# Altium PCB MPPT_V1.0.1.PcbDoc (part 1 of 2)
Units mm, origin at the board's own origin, x right, y up, seen from the top; angles counter-clockwise.
Board outline 82 x 82 mm, 4 copper layers (Top Layer, GND Plane, PWR Plane, Bottom Layer), stack 1.641 mm thick; 90 components, 70 nets, 305 pads, 127 vias.
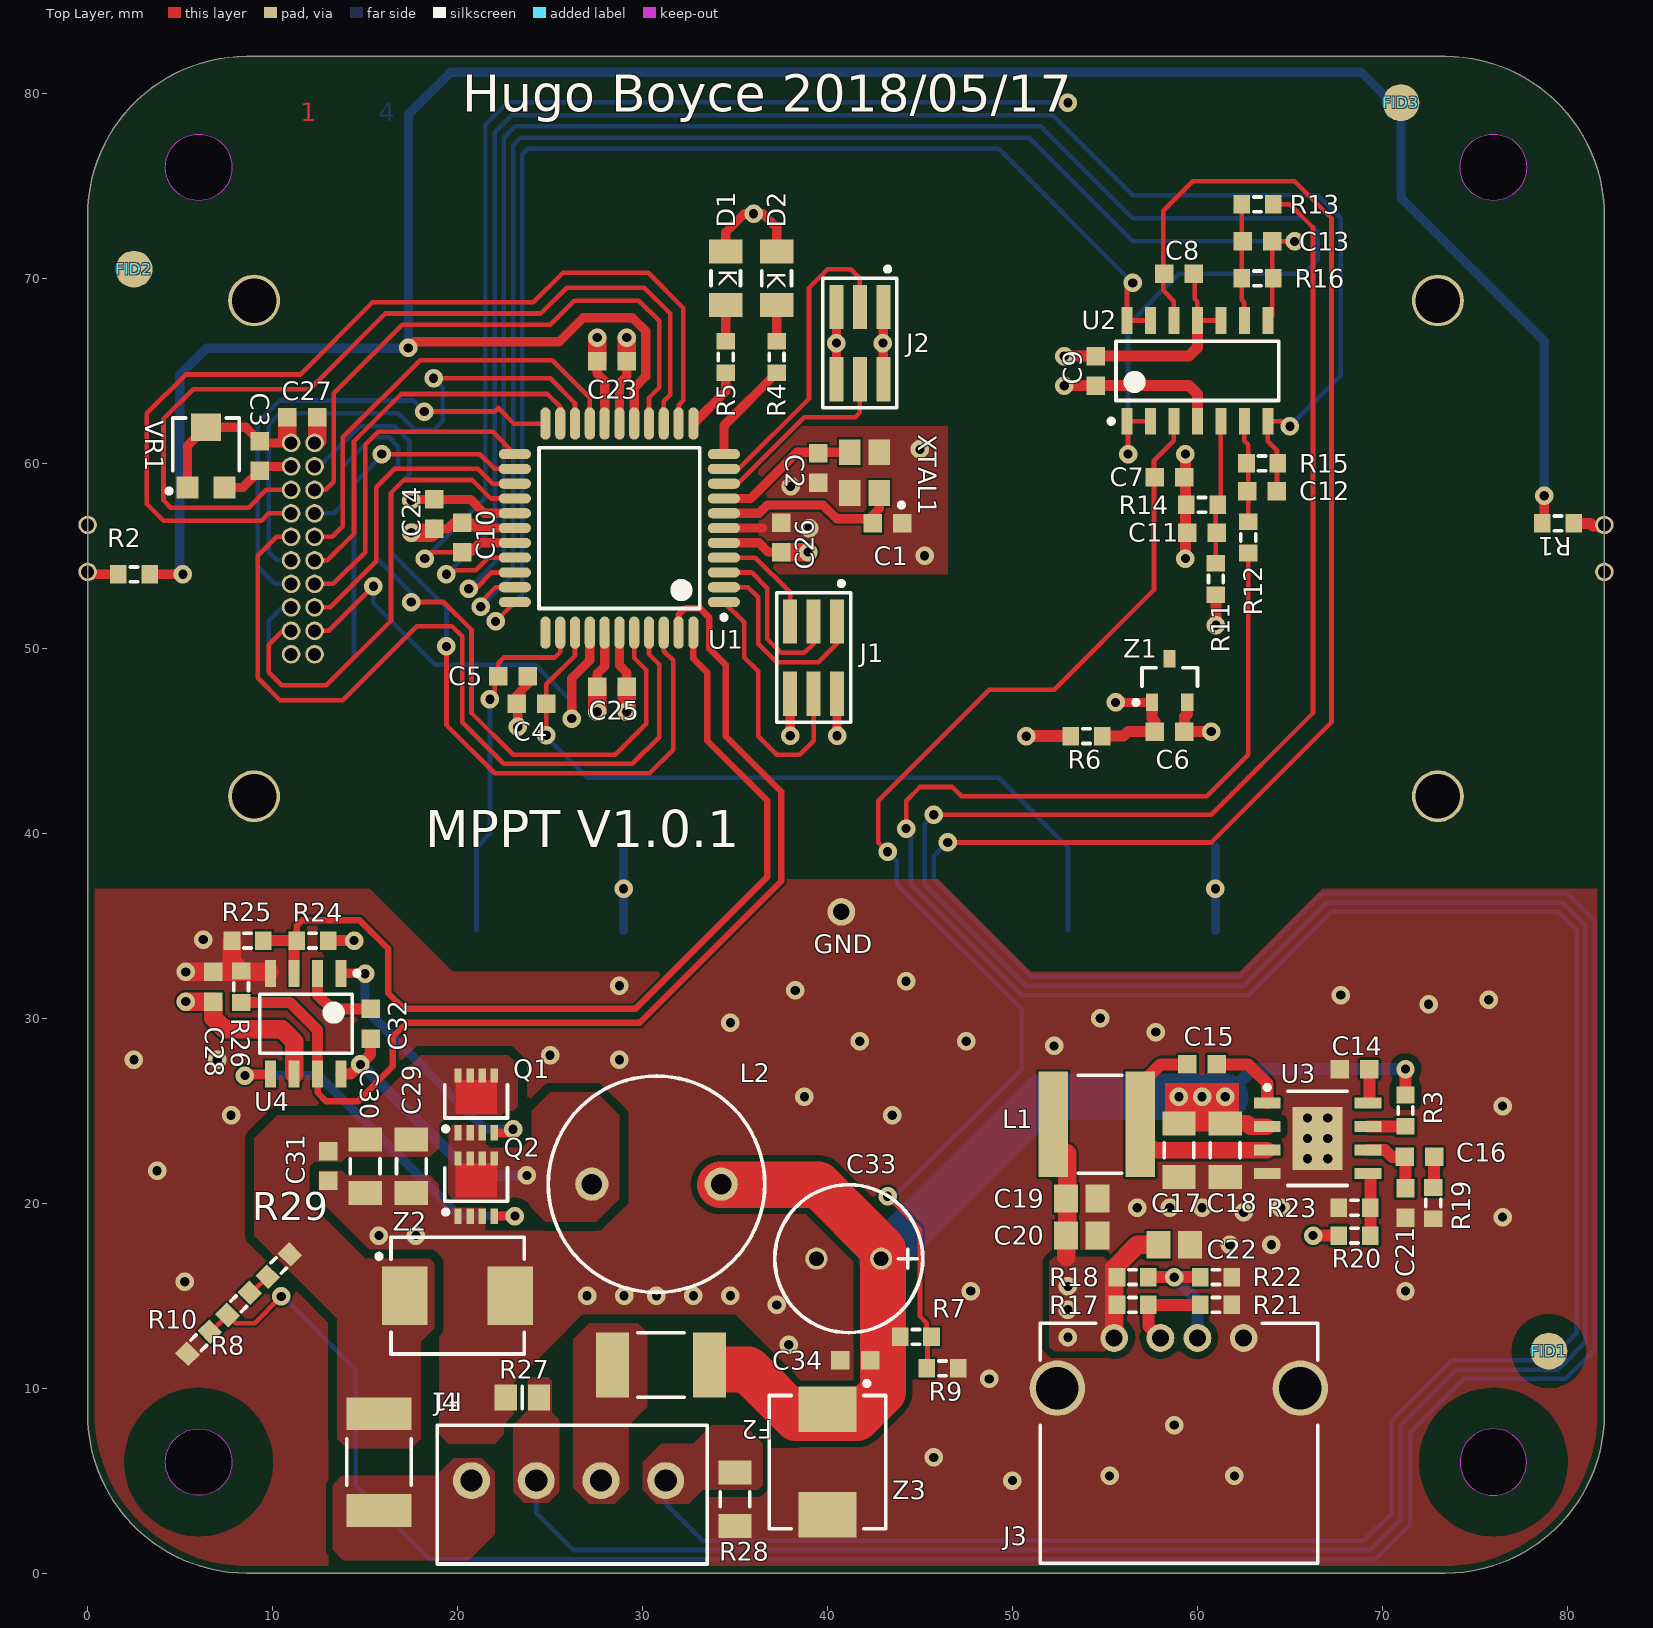
[diagram p0: Top Layer view]
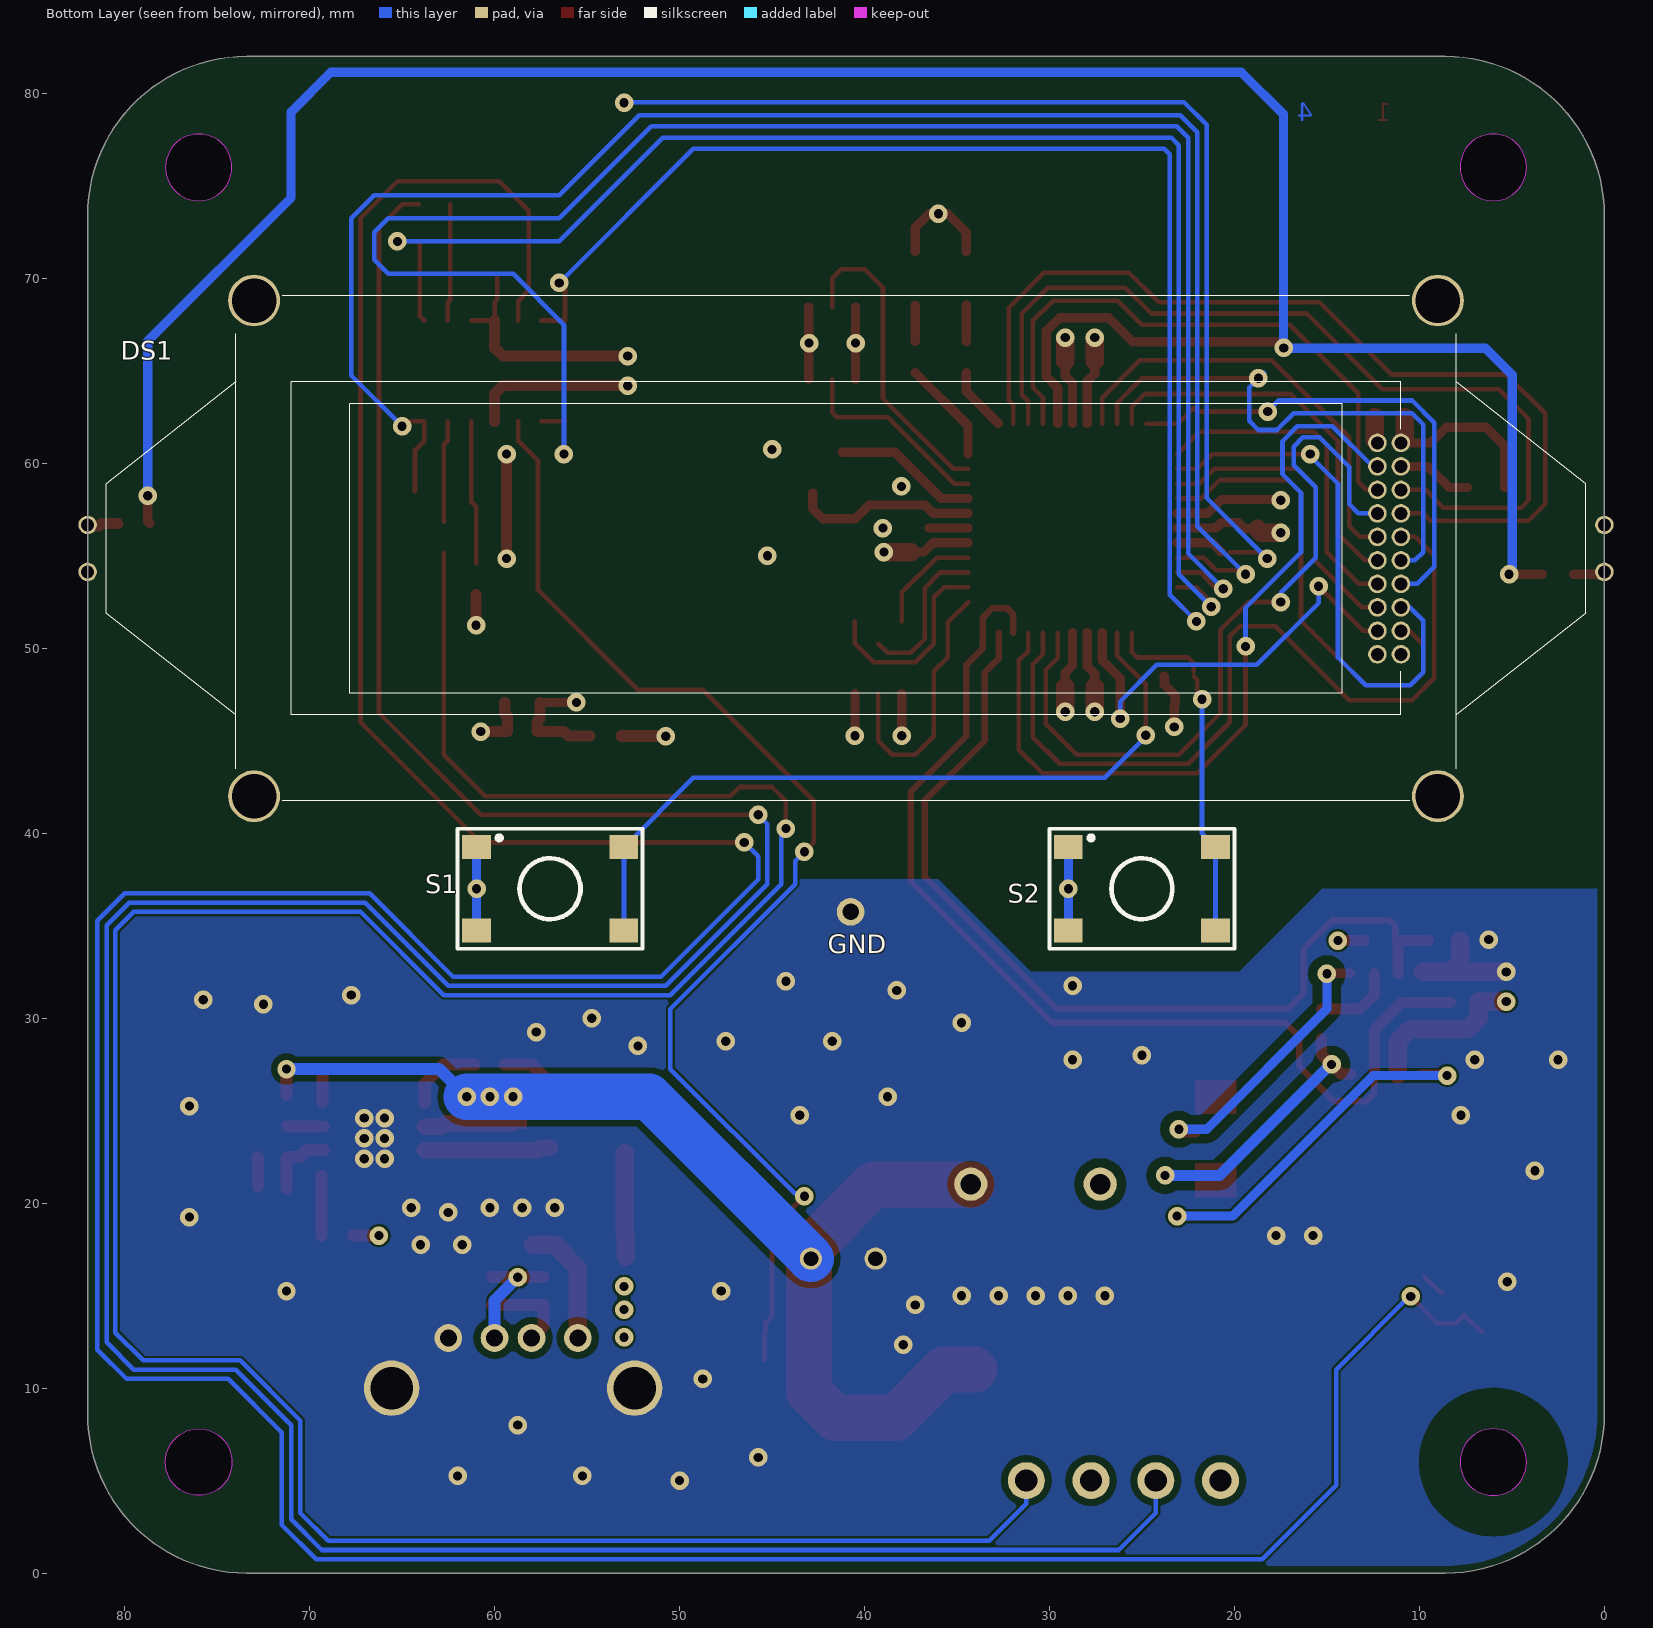
[diagram p1: Bottom Layer view, seen from below]
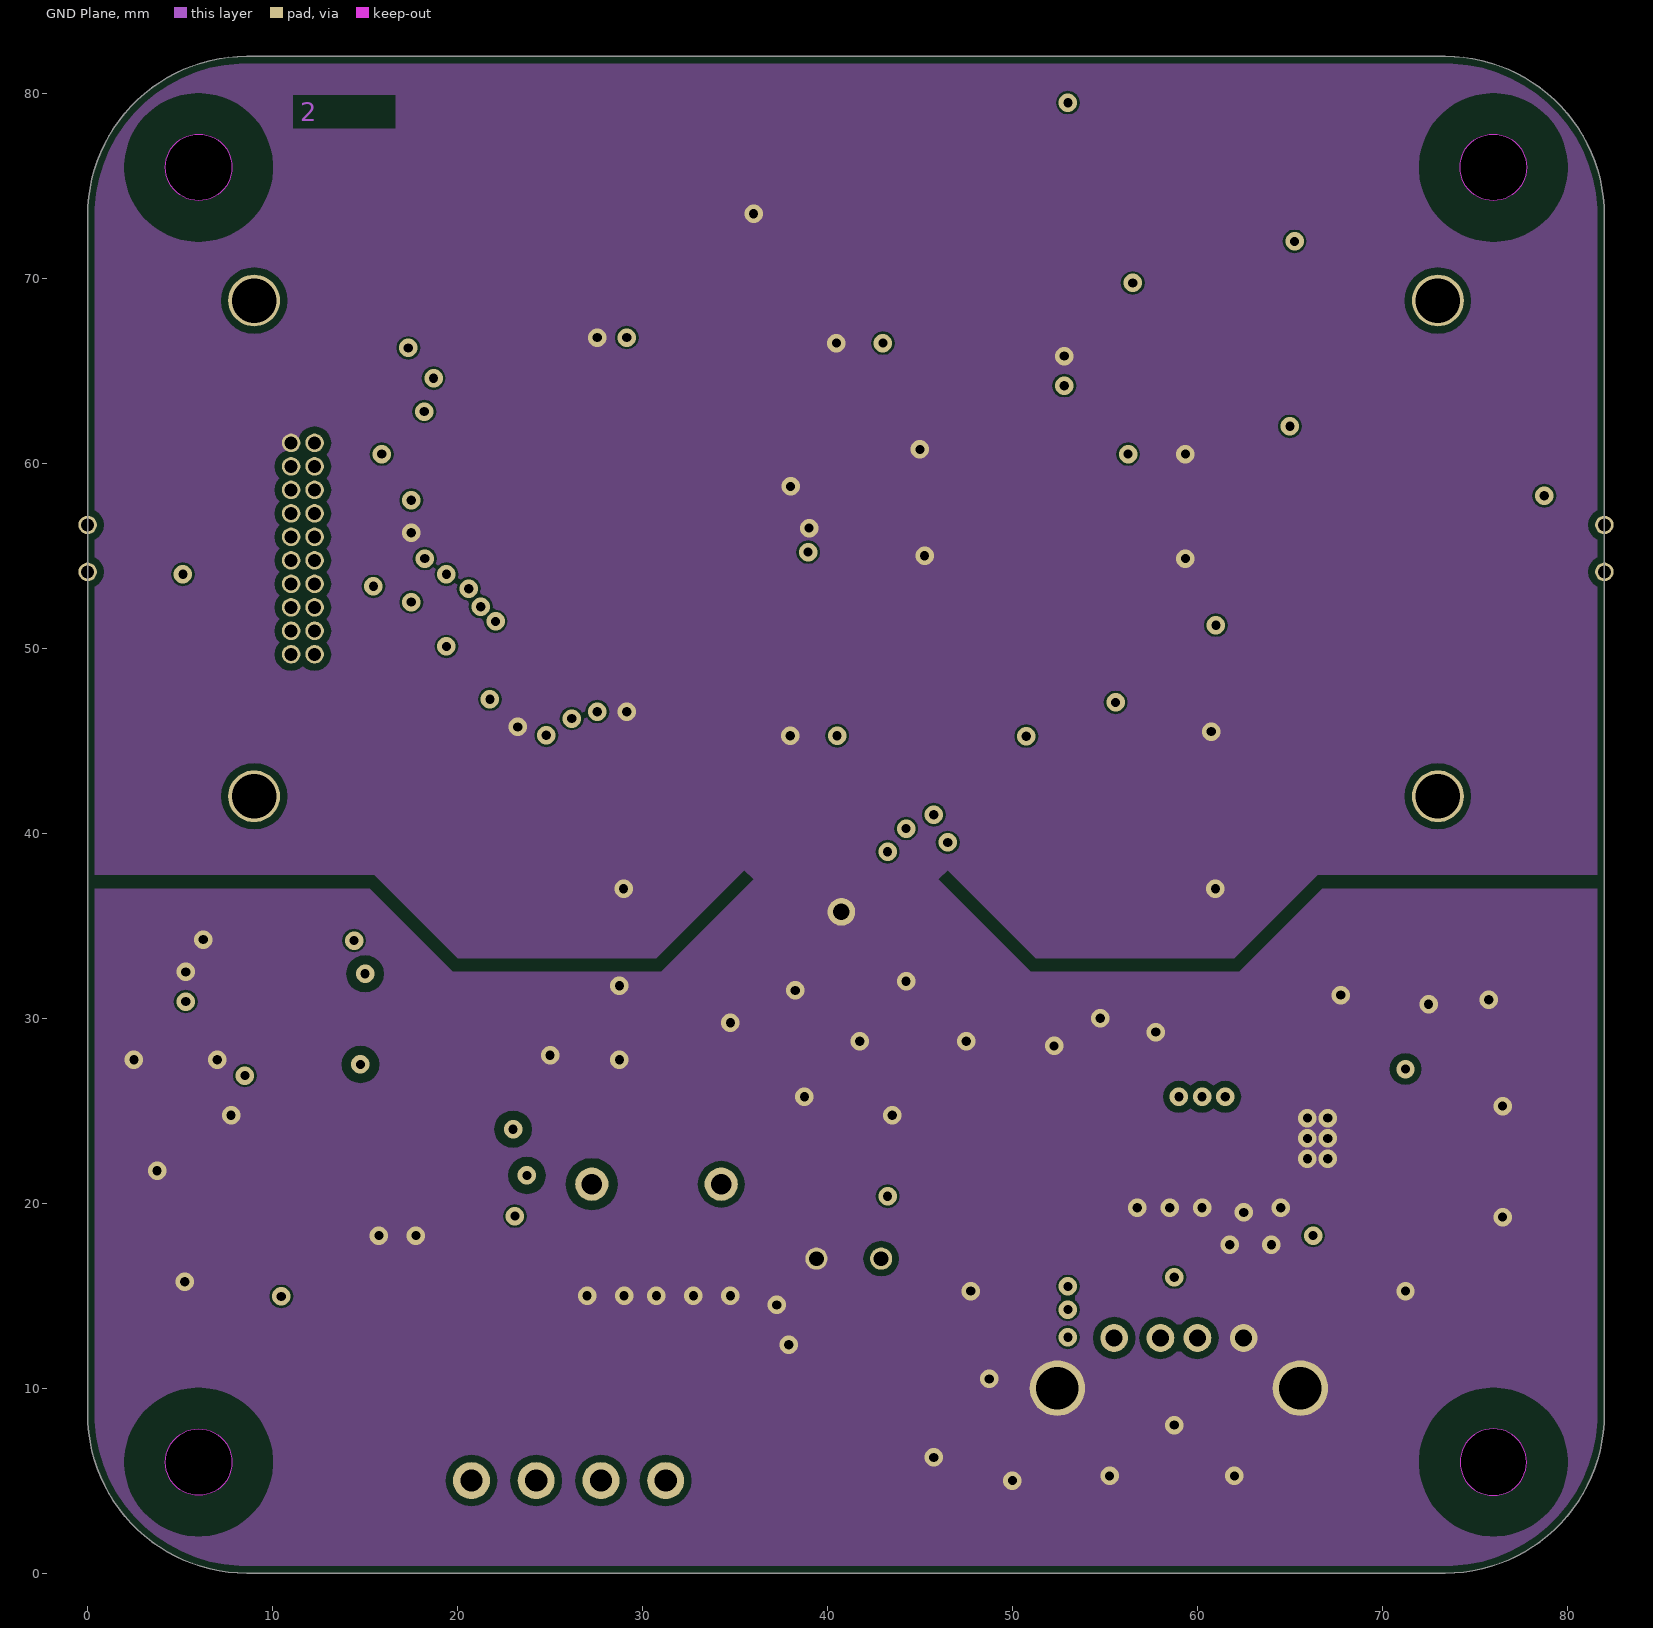
[diagram p2: GND Plane]
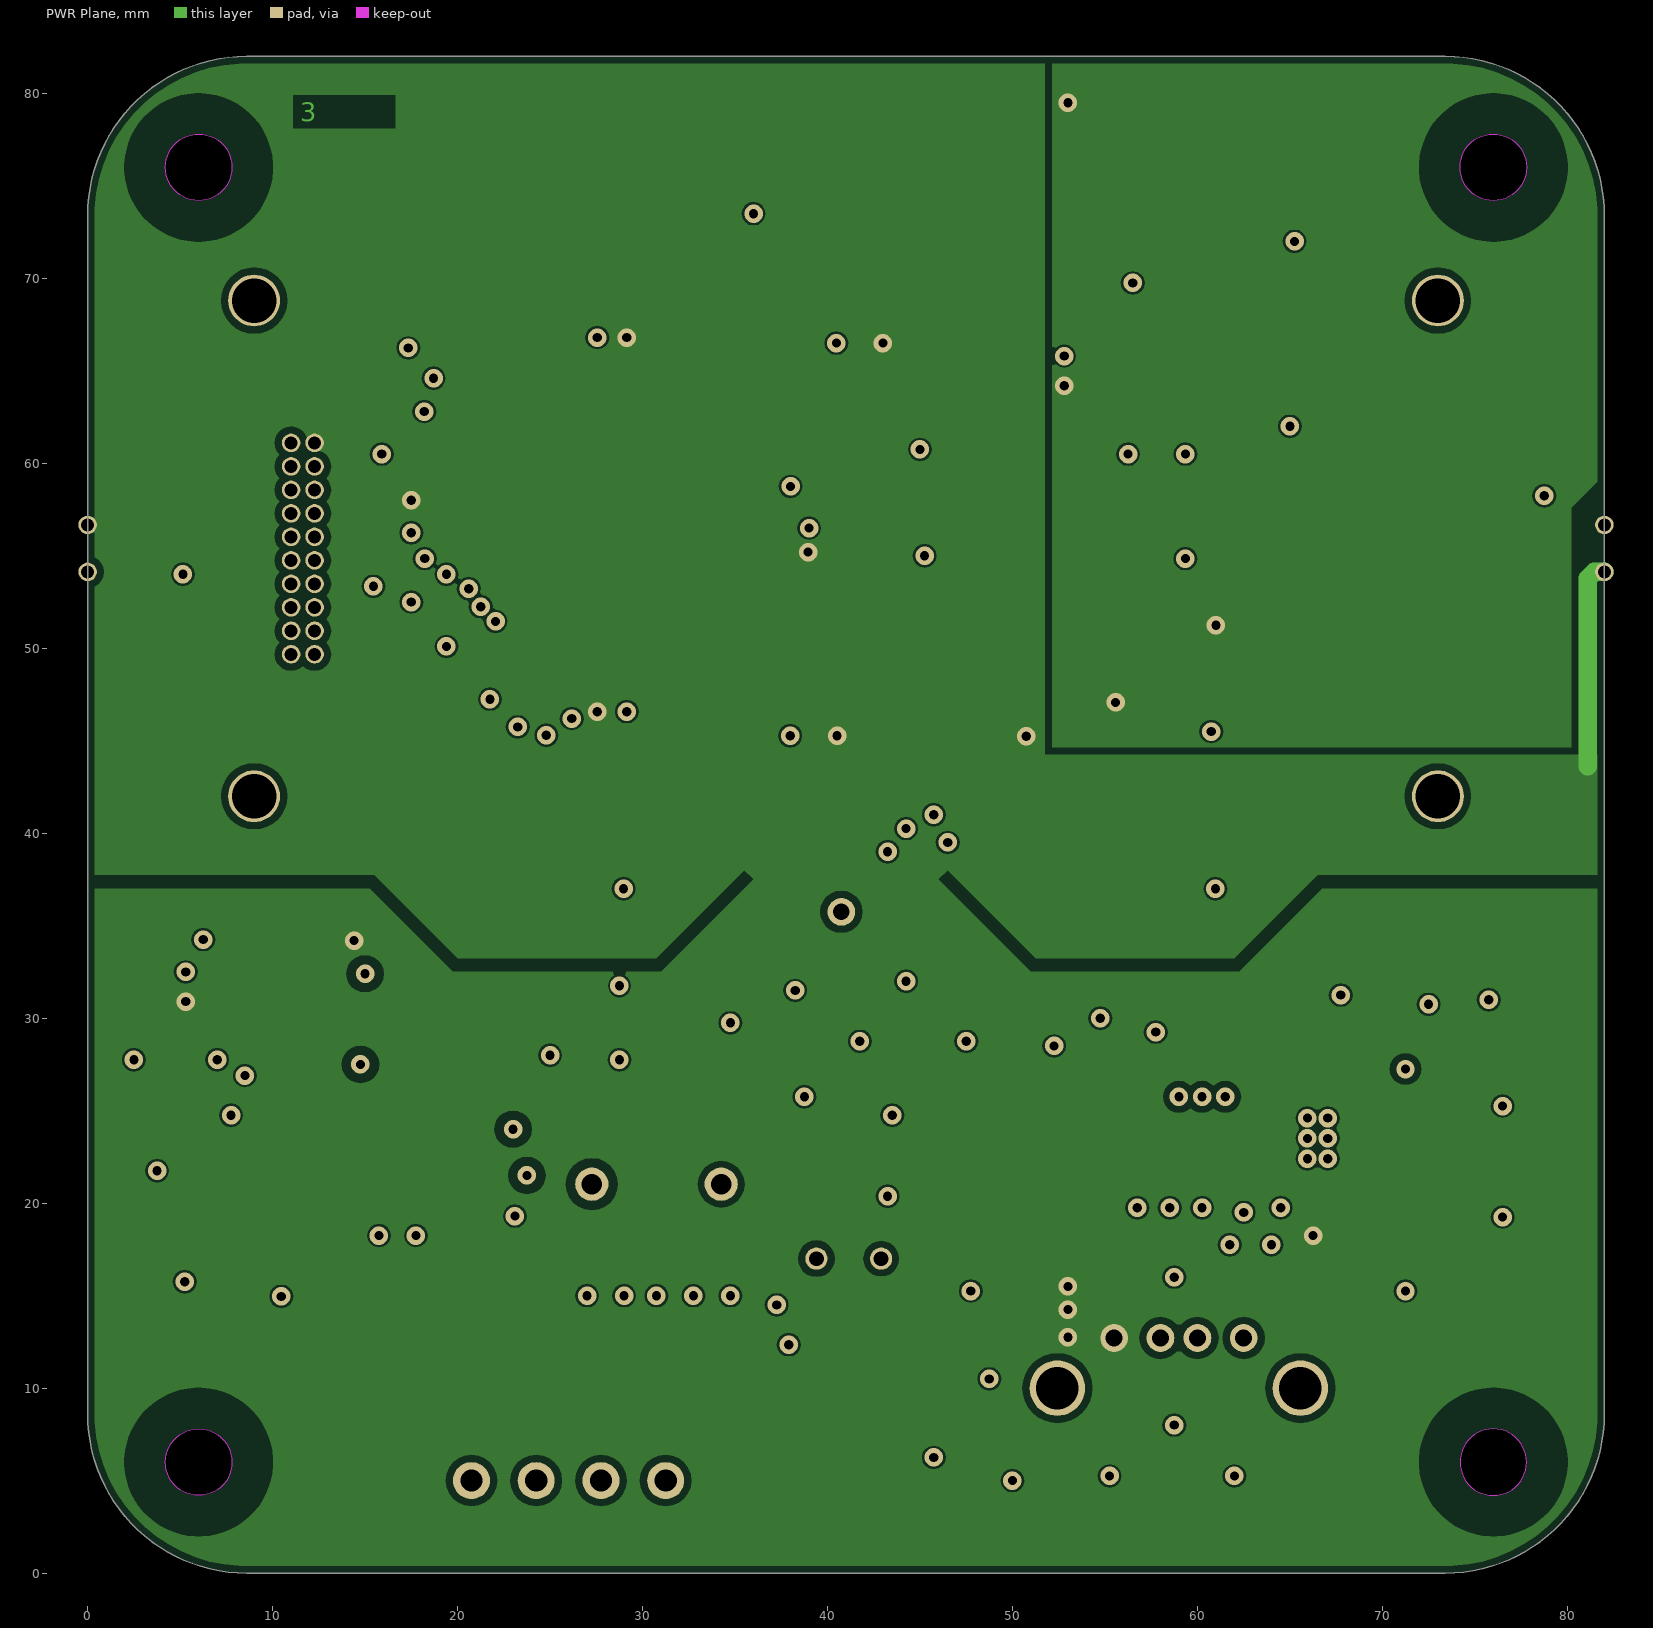
[diagram p3: PWR Plane]

## Layer stack, top to bottom
Top Solder: solder mask 0.0254, Solder Resist, Dk 3.5
Top Layer: signal copper 0.0356
Dielectric 1: prepreg 0.1702, FR408, Dk 4.2
GND Plane: signal copper 0.0178
Dielectric 3: core 1.1938, FR408, Dk 4.2
PWR Plane: signal copper 0.0178
Dielectric 4: prepreg 0.1702, FR408, Dk 4.2
Bottom Layer: signal copper 0.0356
Bottom Solder: solder mask 0.0254, Solder Resist, Dk 3.5

## Board outline
8.6,0 cw(c8.6,8.6) 0,8.6 0,73.4 cw(c8.6,73.4) 8.6,82 73.4,82 cw(c73.4,73.4) 82,73.4 82,8.6 cw(c73.4,8.6) 73.4,0
cut-out: 6,74.2 cw(c6,76) 4.2,76 cw(c6,76) 6,77.8 cw(c6,76) 7.8,76 cw(c6,76)
cut-out: 76,74.2 cw(c76,76) 74.2,76 cw(c76,76) 76,77.8 cw(c76,76) 77.8,76 cw(c76,76)
cut-out: 74.2,6 ccw(c76,6) 76,4.2 ccw(c76,6) 77.8,6 ccw(c76,6) 76,7.8 ccw(c76,6)
cut-out: 6,4.2 cw(c6,6) 4.2,6 cw(c6,6) 6,7.8 cw(c6,6) 7.8,6 cw(c6,6)

## Design rules (kind name [scope] priority, off if disabled: settings)
BoardOutlineClearance BoardOutlineClearance_Main [All] p1: gap=0.381 ignorepadtopadclearanceinfootprint=FALSE except(0: Arc-SplitContinuation Track-SplitContinuation SMDPad-SplitContinuation THPad-SplitContinuation Via-SplitContinuation Fill-SplitContinuation Poly-SplitContinuation Region-SplitContinuation Text-SplitContinuation; 2.2: Arc-CutoutEdge Track-CutoutEdge SMDPad-CutoutEdge THPad-CutoutEdge Via-CutoutEdge Fill-CutoutEdge Poly-CutoutEdge Region-CutoutEdge Text-CutoutEdge)
Clearance Clearance_VBatt [All vs InNet('V_Batt')] p1: gap=0.35 ignorepadtopadclearanceinfootprint=FALSE except(0: Arc-Hole Track-Hole SMDPad-Hole THPad-Hole Via-Hole Fill-Hole Poly-Hole Region-Hole Text-Hole)
Clearance Clearance_V_PV [All vs InNet('V_PV')] p2: gap=0.5 ignorepadtopadclearanceinfootprint=FALSE except(0: Arc-Hole Track-Hole SMDPad-Hole THPad-Hole Via-Hole Fill-Hole Poly-Hole Region-Hole Text-Hole)
Clearance Clearance_NetF1_2 [All vs InNet('NetF1_2')] p3: gap=0.5 ignorepadtopadclearanceinfootprint=FALSE except(0: Arc-Hole Track-Hole SMDPad-Hole THPad-Hole Via-Hole Fill-Hole Poly-Hole Region-Hole Text-Hole)
Clearance Clearance_NetF2_2 [All vs InNet('NetF2_2')] p4: gap=0.5 ignorepadtopadclearanceinfootprint=FALSE except(0: Arc-Hole Track-Hole SMDPad-Hole THPad-Hole Via-Hole Fill-Hole Poly-Hole Region-Hole Text-Hole)
Clearance Clearance_NetQ1_4_NetC32 [InNet('NetQ1_4') vs InNet('NetC32_2')] p5: gap=0.2 ignorepadtopadclearanceinfootprint=FALSE except(0: Arc-Hole Track-Hole SMDPad-Hole THPad-Hole Via-Hole Fill-Hole Poly-Hole Region-Hole Text-Hole)
Clearance Clearance_NetC32_2 [All vs InNet('NetC32_2')] p6: gap=0.5 ignorepadtopadclearanceinfootprint=FALSE except(0: Arc-Hole Track-Hole SMDPad-Hole THPad-Hole Via-Hole Fill-Hole Poly-Hole Region-Hole Text-Hole)
Clearance Clearance_NetQ1_4 [All vs InNet('NetQ1_4')] p7: gap=0.5 ignorepadtopadclearanceinfootprint=FALSE except(0: Arc-Hole Track-Hole SMDPad-Hole THPad-Hole Via-Hole Fill-Hole Poly-Hole Region-Hole Text-Hole)
Clearance Clearance_NetFID [All vs InNet('NetFID')] p8: gap=1 ignorepadtopadclearanceinfootprint=FALSE except(0: Arc-Hole Track-Hole SMDPad-Hole THPad-Hole Via-Hole Fill-Hole Poly-Hole Region-Hole Text-Hole)
Clearance Clearance_Main [All] p9: gap=0.127 ignorepadtopadclearanceinfootprint=FALSE except(0: Arc-Hole Track-Hole SMDPad-Hole THPad-Hole Via-Hole Fill-Hole Poly-Hole Region-Hole Text-Hole; 0.381: THPad-Fill THPad-Poly THPad-Region Fill-Fill Fill-Poly Fill-Region Poly-Poly Poly-Region Region-Region)
HoleSize [All] p1: absolutevalues=TRUE maxlimit=6.604 minlimit=0.254 maxpercent=80.000 minpercent=20.000
MinimumAnnularRing [All] p1: minimumring=0.102
MinimumSolderMaskSliver [All] p1: minsoldermaskwidth=0.102
PlaneConnect [All] p1: planeconnectstyle=Direct reliefexpansion=0.508 reliefentries=4 reliefconductorwidth=0.254 reliefairgap=0.254
PolygonConnect [All] p1: connectstyle=Direct reliefconductorwidth=0.254 reliefentries=4 polygonreliefangle="90 Angle" airgapwidth=0.254
RoutingVias [All] p1: holewidth=0.5 width=1 viastyle="Through Hole" minholewidth=0.254 minwidth=0.457 maxholewidth=1.5 maxwidth=3
SilkToSilkClearance [All] p1: silktosilkclearance=0
SilkToSolderMaskClearance [IsPad] p1: minsilkscreentomaskgap=0.1 clearancetoexposedcopper=TRUE
SolderMaskExpansion [All] p1: expansion=0.05 istentingtop=FALSE
Width [All] p1: maxlimit=5 minlimit=0.127 preferedwidth=1
25 further rules are at their usual default settings.

## Classes and differential pairs
component class MPPT_V1.0_5V_Supply: C14 C15 C16 C17 C18 C19 C20 C21 C22 C23 C24 C25 C26 C27 C28 J3 L1 R3 R17 R18 R19 R20 R21 R22 R23 U3
component class MPPT_V1.0_Analog: C6 C7 C8 C9 C10 C11 C12 C13 R6 R7 R8 R9 R10 R11 R12 R13 R14 R15 R16 U2 Z1
component class MPPT_V1.0_Charger_Converter: C29 C30 C31 C32 C33 C34 F1 F2 J4 L2 Q1 Q2 R24 R25 R26 R27 R28 U4 Z2 Z3
component class MPPT_V1.0_Main: FID1 FID2 FID3 PCB
component class MPPT_V1.0_MCU_and_Display: C1 C2 C3 C4 C5 D1 D2 DS1 J1 J2 R1 R2 R4 R5 S1 S2 U1 VR1 XTAL1

## Components (designator, comment, footprint, x,y, rotation, side; value= is the part's Value field where it differs from the comment)
C1 "Cap SMD" CAPC1608N 43.25,56.75 r180 top value=9pF
C2 "Cap SMD" CAPC1608N 39.5,59.75 r90 top value=9pF
C3 "Cap SMD" CAPC1608N 9.3,60.4 r270 top value=100nF
C4 "Cap SMD" CAPC1608N 24,47 r180 top value=100nF
C5 "Cap SMD" CAPC1608N 23,48.5 r0 top value=100nF
C6 "Cap SMD" CAPC1608N 58.5,45.5 r180 top value=1uF
C7 "Cap SMD" CAPC1608N 58.5,59.25 r180 top value="3.3 nF"
C8 "Cap SMD" CAPC1608N 59,70.25 r180 top value="3.3 nF"
C9 "Cap SMD" CAPC1608N 54.5,65 r270 top value=100nF
C10 "Cap SMD" CAPC1608N 20.25,56 r270 top value=100nF
C11 "Cap SMD" CAPC1608N 60.25,56.25 r0 top value=100nF
C12 "Cap SMD" CAPC1608N 63.5,58.5 r180 top value="68 nF"
C13 "Cap SMD" CAPC1608N 63.25,72 r180 top value=82nF
C14 "Cap SMD" CAPC1608N 68.5,27.25 r180 top value="100 nF"
C15 "1608" CAPC1608N 60.25,27.5 r0 top value=10nF
C16 "Cap SMD" CAPC1608N 72,22.5 r0 top value="3.3 nF"
C17 "CC0805MKX5R7BB106" CAPC3216N 59,22.865 r90 top value="10 uF"
C18 "CC0805MKX5R7BB106" CAPC3216N 61.5,22.865 r90 top value="10 uF"
C19 "JMK212BBJ226MGHT" CAPC2012N 53.75,20.25 r180 top value="22 uF"
C20 "JMK212BBJ226MGHT" CAPC2012N 53.75,18.25 r180 top value="22 uF"
C21 "Cap SMD" CAPC1608N 71.25,20 r270 top value=DNP
C22 "JMK212BBJ226MGHT" CAPC2012N 58.75,17.75 r180 top value="22 uF"
C23 "Cap SMD" CAPC1608N 28.35,65.525 r0 top value=100nF
C24 "Cap SMD" CAPC1608N 18.75,57.25 r90 top value=100nF
C25 "Cap SMD" CAPC1608N 28.35,47.925 r180 top value=100nF
C26 "Cap SMD" CAPC1608N 37.5,56 r270 top value=100nF
C27 "Cap SMD" CAPC1608N 11.6,62.5 r0 top value=100nF
C28 "Cap SMD" CAPC1608N 6.8,31.7 r270 top value=100nF
C29 "Cap SMD" CAPC3216N 17.5,22 r270 top value="10 uF"
C30 "Cap SMD" CAPC3216N 15,22 r270 top value="10 uF"
C31 "Cap SMD" CAPC1608N 13,22 r90 top value="1 uF"
C32 "Cap SMD" CAPC1608N 15.3,29.7 r270 top value="1 uF"
C33 "860080374009" 860080374009 39.4,17 r0 top
C34 "Cap SMD" CAPC1608N 41.5,11.5 r0 top value="1 uF"
D1 "150120RS75000" 150120RS75000 34.5,70 r270 top
D2 "150120RS75000" 150120RS75000 37.25,70 r270 top
DS1 "LCD_ERM12232-1_128X32_MATRIX" LCD_ERM12232 74,41.75 r180 bottom locked
F1 "0ZCG0050AF2C" OZCG0_BEL_FUSE 15.75,6 r90 top
F2 "0ZCG0260BF2B" OZCG0_BEL_FUSE 31,11.25 r0 top
FID1 "2mm" FID_2MM 79,12 r0 top
FID2 "2mm" FID_2MM 2.5,70.5 r0 top
FID3 "2mm" FID_2MM 71,79.5 r0 top
J1 "20021121-00006C4LF" 20021121-00006 39.25,49.5 r180 top
J2 "20021121-00006C4LF" 20021121-00006 41.75,66.5 r180 top
J3 "UE27AC54100" UE27AC5410 59,10 r0 top
J4 "1984633" 1984633 26,5 r0 top
L1 "NR6028T4R7M" NR6028 54.555,24.262 r0 top
L2 "RLB1314-101KL" BOURNS_RLB1314 27.255,21.024 r0 top
Q1 "BUK9M53-60EX" BUK9M53-60E 21,25.5 r0 top
Q2 "BUK9M53-60EX" BUK9M53-60E 21,21 r0 top
R1 "Res SMD" RESC1608N 79.5,56.75 r0 top value=330R
R2 "Res SMD" RESC1608N 2.5,54 r180 top value=330R
R3 "Res SMD" RESC1608N 71.25,25 r90 top value=100K
R4 "Res SMD" RESC1608N 37.25,65.75 r90 top value=1K
R5 "Res SMD" RESC1608N 34.5,65.75 r90 top value=1K
R6 "Res SMD" RESC1608N 54,45.25 r180 top value=160R
R7 "Res SMD" RESC1608N 44.776,12.764 r180 top value=150K
R8 "Res SMD" RESC1608N 8.164,14.552 r45 top value=300K
R9 "Res SMD" RESC1608N 46.212,11.069 r180 top value=50K
R10 "Res SMD" RESC1608N 5.998,12.452 r45 top value=50K
R11 "Res SMD" RESC1608N 61,53.75 r270 top value=200K
R12 "Res SMD" RESC1608N 62.75,56 r90 top value=2K
R13 "Res SMD" RESC1608N 63.25,74 r0 top value=1K5
R14 "Res SMD" RESC1608N 60.25,57.75 r0 top value=1K
R15 "Res SMD" RESC1608N 63.5,60 r180 top value=100K
R16 "Res SMD" RESC1608N 63.25,70 r180 top value=120K
R17 "Res SMD" RESC1608N 56.5,14.5 r180 top value=1K
R18 "Res SMD" RESC1608N 56.5,16 r180 top value=1K
R19 "Res SMD" RESC1608N 72.75,20 r270 top value=13K
R20 "Res SMD" RESC1608N 68.5,18.25 r180 top value=33K
R21 "Res SMD" RESC1608N 61,14.5 r180 top value=1K
R22 "Res SMD" RESC1608N 61,16 r180 top value=1K
R23 "Res SMD" RESC1608N 68.5,19.75 r0 top value=7K5
R24 "Res SMD" RESC1608N 12.15,34.2 r0 top value=7K5
R25 "Res SMD" RESC1608N 8.65,34.2 r0 top value=7K5
R26 "Res SMD" RESC1608N 8.3,31.7 r270 top value=7K5
R27 "Res SMD" RESC2012N 23.5,9.5 r180 top value=0R1
R28 "Res SMD" RESC3216N 35,4 r90 top value=0R02
R29 "Res SMD" RESC1608N 10.33,16.631 r45 top value=300K
S1 "PTS645SM95SMTR92LFS" PTS645SM95SMTR92LFS 57,37 r180 bottom
S2 "PTS645SM95SMTR92LFS" PTS645SM95SMTR92LFS 25,37 r180 bottom
U1 "ATmega164A-AU" 44A_N 28.75,56.5 r180 top
U2 "LMV324IYDT" LMV324IYDT 60,65 r90 top
U3 "AP3513EMPTR-G1" AP3513E 66.5,23.5 r0 top
U4 "ISL6208CBZ-T" ISL6208CBZ-T 11.8,29.7 r270 top
VR1 "TC33X-2-103E" TC33_BOURNS 6.4,60.5 r0 top
XTAL1 "TSX-3225 20.0000MF20G-AC3" EPSON_TSX-3225 42,59.5 r90 top
Z1 "LM4040CYM3-4.1-TR" LM4040C 58.5,48.25 r90 top
Z2 "SMCJ26A-13-F" SMCJxxx 20,15 r0 top
Z3 "SMCJ160A" SMCJxxx 40,6 r270 top

## Footprints (in the part's own frame and the unit in brackets; to place one, negate y for a bottom-side part, rotate by r counter-clockwise, add the part's x,y. Pads: shape width x height; smd on the part's side, far side on the other; paste and mask are expansions set on the pad)
44A_N [mm] "Thin QFP, 44-Leads, Body 10x10mm, Pitch 0.8mm, IPC Medium Density"
  oval 1.75x0.55 smd: 1(-5.65,4) 2(-5.65,3.2) 3(-5.65,2.4) 4(-5.65,1.6) 5(-5.65,0.8) 6(-5.65,0) 7(-5.65,-0.8) 8(-5.65,-1.6) 9(-5.65,-2.4) 10(-5.65,-3.2) 11(-5.65,-4) 23(5.65,-4) 24(5.65,-3.2) 25(5.65,-2.4) 26(5.65,-1.6) 27(5.65,-0.8) 28(5.65,0) 29(5.65,0.8) 30(5.65,1.6) 31(5.65,2.4) 32(5.65,3.2) 33(5.65,4)
  oval 0.55x1.75 smd: 12(-4,-5.65) 13(-3.2,-5.65) 14(-2.4,-5.65) 15(-1.6,-5.65) 16(-0.8,-5.65) 17(0,-5.65) 18(0.8,-5.65) 19(1.6,-5.65) 20(2.4,-5.65) 21(3.2,-5.65) 22(4,-5.65) 34(4,5.65) 35(3.2,5.65) 36(2.4,5.65) 37(1.6,5.65) 38(0.8,5.65) 39(0,5.65) 40(-0.8,5.65) 41(-1.6,5.65) 42(-2.4,5.65) 43(-3.2,5.65) 44(-4,5.65)
  silkscreen extent -5.77,-4.35 4.35,4.95, body extent -5,-5 5,5, height 1.2
150120RS75000 [mm] "LED 1206 Package"
  rect 1.3x1.8 smd: 1(-1.45,0) 2(1.45,0)
  silkscreen extent -0.4,-0.8 0.4,0.8, body extent -1.6,-0.8 1.6,0.8, height 0.68
1984633 [mm] "Phoenix Contact PCB Screw Termination Block 4 position"
  round 2 hole 1.2: 1(-5.25,0) 2(-1.75,0) 3(1.75,0) 4(5.25,0)
  silkscreen extent -7.1,-4.51 7.5,3, body extent -7.04,-4.6 7.53,3, height 9.05
20021121-00006 [mm] "2x3 Header 50 mil pitch"
  rect 0.76x2.4 smd: 1(-1.27,-1.95) 2(-1.27,1.95) 3(0,-1.95) 4(0,1.95) 5(1.27,-1.95) 6(1.27,1.95)
  silkscreen extent -2,-4.12 2,3.5, body extent -1.88,-2.75 1.92,2.75, height 4.5
860080374009 [mm]
  round 1.2 hole 0.8: 1(0,0) 2(3.5,0)
  silkscreen extent -2.25,-4 5.75,4, body extent -2.25,-4.02 5.75,3.97, height 11.5
AP3513E [mm] "SOIC-8"
  rect 1.45x0.6 smd: 1(-2.725,1.905) 2(-2.725,0.635) 3(-2.725,-0.635) 4(-2.725,-1.905) 5(2.725,-1.905) 6(2.725,-0.635) 7(2.725,0.635) 8(2.725,1.905)
  rect 2.71x3.4 smd: 9(0,0)
  silkscreen extent -2.85,-2.55 1.6,2.88, body extent -3,-2.55 3,2.55, height 1.55
BOURNS_RLB1314 [mm] "Murata Radial TH inductor"
  round 1.8 hole 1.1: 1(0,0) 2(7,0)
  silkscreen extent -2.35,-5.85 9.35,5.85, body extent -2.34,-5.8 9.36,5.9, height 12
BUK9M53-60E [mm] "TSOP, 8-Leads, Body 3,30x2,60mm, Pitch 0,65mm, Thermal Pad 0,00x0,00mm, IPC Medium Density"
  rect 0.4x0.83 smd mask+0.05: 1(-0.975,-1.7) 2(-0.325,-1.7) 3(0.325,-1.7) 4(0.975,-1.7)
  rect 0.4x0.75 smd mask+0.05: 5(0.975,1.41) 6(0.325,1.41) 7(-0.325,1.41) 8(-0.975,1.41)
  Top Layer region: -1.125,-0.685 1.125,-0.685 1.125,1.165 -1.125,1.165
  silkscreen extent -1.77,-1.61 1.7,0.9, body extent -1.64,-1.91 1.66,1.39, height 0.84
CAPC1608N [mm] "Chip Capacitor, Body 1.6x0.8mm, IPC Medium Density"
  rect 1x1 smd: 1(-0.8,0) 2(0.8,0)
  body extent -0.87,-0.48 0.87,0.48, height 0.85
CAPC2012N [mm] "Chip Capacitor, Body 2.0x1.3mm, IPC Medium Density"
  rect 1.3x1.5 smd: 1(-0.85,0) 2(0.85,0)
  body extent -1.1,-0.72 1.1,0.72, height 1.1
CAPC3216N [mm] "Chip Capacitor, Body 3.2x1.6mm, IPC Medium Density"
  rect 1.3x1.8 smd: 1(-1.45,0) 2(1.45,0)
  silkscreen extent -0.4,-0.8 0.4,0.8, body extent -1.7,-0.9 1.7,0.9, height 1.35
EPSON_TSX-3225 [mm] "EPSON XTAL"
  rect 1.4x1.15 smd: 1(-1.1,-0.8) 2(1.1,-0.8) 3(1.1,0.8) 4(-1.1,0.8)
  silkscreen extent -1.87,-2.13 -1.63,-1.88, body extent -1.6,-1.25 1.6,1.25, height 0.6
FID_2MM [mm] "Fiducial, 2mm"
  round 2 smd paste+0 mask+1: 0(0,0)
ISL6208CBZ-T [mm] "SOIC, 8-Leads, Body 4,90x3,90mm, Pitch 1,27mm, IPC Medium Density"
  rect 1.45x0.6 smd: 1(-2.725,1.905) 2(-2.725,0.635) 3(-2.725,-0.635) 4(-2.725,-1.905) 5(2.725,-1.905) 6(2.725,-0.635) 7(2.725,0.635) 8(2.725,1.905)
  silkscreen extent -2.85,-2.5 1.6,2.88, body extent -3,-2.5 3,2.5, height 1.75
LCD_ERM12232 [mm]
  round 1 hole 0.7: 1(63,19.355) 2(61.73,19.355) 3(63,18.085) 4(61.73,18.085) 5(63,16.815) 6(61.73,16.815) 7(63,15.545) 8(61.73,15.545) 9(63,14.275) 10(61.73,14.275) 11(63,13.005) 12(61.73,13.005) 13(63,11.735) 14(61.73,11.735) 15(63,10.465) 16(61.73,10.465) 17(63,9.195) 18(61.73,9.195) 19(63,7.925) 20(61.73,7.925) 21(-8,12.38) 22(-8,14.92) 23(74,14.92) 24(74,12.38)
  round 2.8 hole 2.4: 25(1,0.25) 26(1,27.05) 27(65,0.25) 28(65,27.05)
  silkscreen extent -7,0 73,27.3, body extent -7,0 73,27.3, height 8.5
LM4040C [mm] "SOT-23"
  rect 0.95x0.65 smd: 1(-1.175,0.95) 2(-1.175,-0.95) 3(1.175,0)
  silkscreen extent -1.3,-1.5 0.7,1.95, body extent -1.27,-1.52 1.27,1.52, height 1.15
LMV324IYDT [mm]
  rect 1.45x0.6 smd: 1(-2.725,3.81) 2(-2.725,2.54) 3(-2.725,1.27) 4(-2.725,0) 5(-2.725,-1.27) 6(-2.725,-2.54) 7(-2.725,-3.81) 8(2.725,-3.81) 9(2.725,-2.54) 10(2.725,-1.27) 11(2.725,0) 12(2.725,1.27) 13(2.725,2.54) 14(2.725,3.81)
  silkscreen extent -2.85,-4.4 1.6,4.78, body extent -3,-4.4 3,4.4, height 1.75
NR6028 [mm] "Taiyo Yuden SMD Inductor"
  rect 1.6x5.7 smd: 1(-2.35,0) 2(2.35,0)
  silkscreen extent -1,-2.65 1.35,2.65, body extent -2.45,-2.5 2.55,2.52, height 3.5
OZCG0_BEL_FUSE [mm] "Bel Fuse PPTC"
  rect 1.78x3.5 smd: 1(-2.615,0) 2(2.615,0)
  silkscreen extent -1.25,-1.75 1.25,1.75, body extent -2.35,-1.7 2.35,1.7, height 1.55
PTS645SM95SMTR92LFS [mm] "Pushbutton 9.5mm"
  rect 1.55x1.3 smd: 1(-3.975,2.25) 2(3.975,2.25) 3(-3.975,-2.25) 4(3.975,-2.25)
  silkscreen extent -5,-3.25 5,3.25, body extent -4.5,-3 4.5,3, height 9.5
RESC1608N [mm] "Chip Resistor, Body 1.6x0.8mm, IPC Medium Density"
  rect 0.9x1 smd: 1(-0.85,0) 2(0.85,0)
  silkscreen extent -0.2,-0.4 0.2,0.4, body extent -0.85,-0.48 0.85,0.48, height 0.6
RESC2012N [mm] "Chip Resistor, Body 2.0x1.3mm, IPC Medium Density"
  rect 1.2x1.4 smd: 1(-0.9,0) 2(0.9,0)
  silkscreen extent 0,-0.6 0,0.6, body extent -1.07,-0.7 1.07,0.7, height 0.65
RESC3216N [mm] "Chip Resistor, Body 3.2x1.6mm, IPC Medium Density"
  rect 1.3x1.8 smd: 1(-1.45,0) 2(1.45,0)
  silkscreen extent -0.4,-0.8 0.4,0.8, body extent -1.68,-0.87 1.68,0.87, height 0.71
SMCJxxx [mm] "DO-214AB (SMC J-Bend)"
  rect 2.45x3.15 smd: 1(-2.85,0) 2(2.85,0)
  silkscreen extent -4.37,-3.15 3.6,3.15, body extent -3.77,-3.11 3.77,3.11, height 2.62
TC33_BOURNS [mm] "Bourns Trimpot"
  rect 1.2x1.2 smd: 1(-1,-1.8) 3(1,-1.8)
  rect 1.6x1.5 smd: 2(0,1.45)
  silkscreen extent -2.12,-2.12 1.8,1.95, body extent -1.8,-2.01 1.8,1.95, height 1.13
UE27AC5410 [mm] "USB Connector"
  round 1.5 hole 0.92: 1(-3.5,2.71) 2(-1,2.71) 3(1,2.71) 4(3.5,2.71)
  round 3 hole 2.3: 5(-6.57,0) 5(6.57,0)
  silkscreen extent -7.5,-9.47 7.5,3.5, body extent -7.42,-10.3 7.42,3.5, height 7.6

## Part data
C1 C2 C3 C4 C5 C6 C7 C8 C9 C10 C11 C12 C13 C14 C16 C21 C23 C24 C25 C26 C27 C28 C32: "Capacitor", LatestRevisionDate=17-Jul-2002, LatestRevisionNote="Re-released for DXP Platform.", PackageDescription="Radial Cap, Thru-Hole; 2 Leads; 0.3 in Pin Spacing", PackageReference=RAD-0.3, Published=8-Jun-2000, Publisher="Altium Limited"
C15: library part "Cap SMD", "Capacitor", LatestRevisionDate=17-Jul-2002, LatestRevisionNote="Re-released for DXP Platform.", PackageDescription="Radial Cap, Thru-Hole; 2 Leads; 0.3 in Pin Spacing", PackageReference=RAD-0.3, Published=8-Jun-2000, Publisher="Altium Limited"
C17 C18: library part "Cap SMD", "Capacitor", Voltage Rating=35V, LatestRevisionDate=17-Jul-2002, LatestRevisionNote="Re-released for DXP Platform.", PackageDescription="Radial Cap, Thru-Hole; 2 Leads; 0.3 in Pin Spacing", PackageReference=RAD-0.3, Published=8-Jun-2000, Publisher="Altium Limited", Size="1206 (3216 Metric)"
C19 C20 C22: library part "Cap SMD", "Capacitor", Voltage Rating=6.3V, LatestRevisionDate=17-Jul-2002, LatestRevisionNote="Re-released for DXP Platform.", PackageDescription="Radial Cap, Thru-Hole; 2 Leads; 0.3 in Pin Spacing", PackageReference=RAD-0.3, Published=8-Jun-2000, Publisher="Altium Limited", Size="0805 (2012 Metric)"
C29 C30 C31 C34: "Capacitor", Voltage Rating=35V, LatestRevisionDate=17-Jul-2002, LatestRevisionNote="Re-released for DXP Platform.", PackageDescription="Radial Cap, Thru-Hole; 2 Leads; 0.3 in Pin Spacing", PackageReference=RAD-0.3, Published=8-Jun-2000, Publisher="Altium Limited"
  C29 C30: Size="1206 (3216 Metric)"
C33: "CAP ALUM 220UF 20% 16V THRU HOLE", ESR (Equivalent Series Resistance)=-, Lifetime @ Temp.="3000 Hrs @ 105°C", Manufacturer="Wurth Electronics Inc.", Operating Temperature="-55°C ~ 105°C", Package / Case="Radial, Can", Supplier Part Number 1=732-8997-1-ND, Tolerance=±20%, Applications="General Purpose", Category=Capacitors, ComponentLink1Description=http://katalog.we-online.de/pbs/datasheet/860080374009.pdf, ComponentLink1URL=http://katalog.we-online.de/pbs/datasheet/860080374009.pdf, Height - Seated (Max)="0.512\" (13.00mm)", Lead Spacing="0.138\" (3.50mm)", Manufacturer Part Number=860080374009, Mounting Type="Through Hole", Packaging="Cut Tape (CT)", Part Status=Active, Polarization=Polar, Pricing 1="1=0.33, 50=0.276, 100=0.2403, 250=0.21424 (CAD)", Ratings=-, RoHS="RoHS Compliant", Size / Dimension="0.315\" Dia (8.00mm)", Stock 1=716, Supplier 1=Digi-Key, Surface Mount Land Size=-
D1 D2: "LED RED CLEAR 1206 SMD", Color=Red, Current - Test=20mA, Lens Color=Colorless, Manufacturer="Wurth Electronics Inc.", Millicandela Rating=150mcd, Package / Case="1206 (3216 Metric)", Supplier Device Package=1206, Supplier Part Number 1=732-4991-1-ND, Voltage - Forward (Vf) (Typ)=2V, Category=Optoelectronics, ComponentLink1Description=http://katalog.we-online.de/led/datasheet/150120RS75000.pdf, ComponentLink1URL=http://katalog.we-online.de/led/datasheet/150120RS75000.pdf, Features=-, Height (Max)=0.69mm, Lens Style/Size="Rectangle with Flat Top, 2.00mm x 1.60mm", Lens Transparency=Clear, Manufacturer Part Number=150120RS75000, Mounting Type="Surface Mount", Packaging="Cut Tape (CT)", Part Status=Active, Pricing 1="1=0.27, 50=0.2582, 100=0.2211, 500=0.18952 (CAD)", RoHS="RoHS Compliant", Size / Dimension="3.20mm L x 1.60mm W", Stock 1=14076, Supplier 1=Digi-Key, Viewing Angle=140°, Wavelength - Dominant=625nm, Wavelength - Peak=630nm
DS1: library part LCD_ERM12232-1_128X64_MATRIX, "128x64 Graphic LCD Module, EastRising"
F1: "PTC RESET FUSE 30V 500MA 1812", Breaking Capacity @ Rated Voltage=50A, Color=-, Manufacturer="Littelfuse Inc.", Manufacturer Part Number=0154.250DR, Operating Temperature="-55°C ~ 125°C", Package / Case="2-SMD, Square End Block with Holder", Supplier Part Number 1=F1219CT-ND, Approvals=UL, Category="Circuit Protection", ComponentLink1Description=http://www.littelfuse.com/~/media/electronics/datasheets/fuses/littelfuse_fuse_154_154t_154l_154tl_datasheet.pdf.pdf, ComponentLink1URL=http://www.littelfuse.com/~/media/electronics/datasheets/fuses/littelfuse_fuse_154_154t_154l_154tl_datasheet.pdf.pdf, Fuse Type="Board Mount (Cartridge Style Excluded)", Mounting Type="Holder, Surface Mount", Packaging="Cut Tape (CT)", Part Status=Active, Pricing 1="1=4.13, 5=3.934, 10=3.737, 50=3.0158, 100=2.557, 250=2.49144, 500=2.09804 (CAD)", Response Time=Fast, RoHS="RoHS Compliant", Size / Dimension="0.383\" L x 0.198\" W x 0.150\" H (9.73mm x 5.03mm x 3.81mm)", Stock 1=2479, Supplier 1=Digi-Key
F2: "PTC RESET FUSE 16V 2.6A 1812", Breaking Capacity @ Rated Voltage=50A, Color=-, Manufacturer="Littelfuse Inc.", Manufacturer Part Number=0154001.DR, Operating Temperature="-55°C ~ 125°C", Package / Case="2-SMD, Square End Block with Holder", Supplier Part Number 1=F1222CT-ND, Approvals="PSE, UL", Category="Circuit Protection", ComponentLink1Description=http://www.littelfuse.com/~/media/electronics/datasheets/fuses/littelfuse_fuse_154_154t_154l_154tl_datasheet.pdf.pdf, ComponentLink1URL=http://www.littelfuse.com/~/media/electronics/datasheets/fuses/littelfuse_fuse_154_154t_154l_154tl_datasheet.pdf.pdf, Fuse Type="Board Mount (Cartridge Style Excluded)", Mounting Type="Holder, Surface Mount", Packaging="Cut Tape (CT)", Part Status=Active, Pricing 1="1=3.5, 5=3.34, 10=3.172, 50=2.5608, 100=2.1711, 250=2.1154, 500=1.7814 (CAD)", Response Time=Fast, RoHS="RoHS Compliant", Size / Dimension="0.383\" L x 0.198\" W x 0.150\" H (9.73mm x 5.03mm x 3.81mm)", Stock 1=11418, Supplier 1=Digi-Key
FID1 FID2 FID3: library part FID_2mm, "Fiducial, 2mm"
J1 J2: "CONN HEADER 6POS DL UNSHRD SMD", Current Rating=-, Insulation Color=Black, Manufacturer="Amphenol FCI", Material Flammability Rating="UL94 V-0", Supplier Part Number 1=609-3693-1-ND, Applications=-, Category="Connectors, Interconnects", ComponentLink1Description=https://cdn.amphenol-icc.com/media/wysiwyg/files/drawing/20021121.pdf, ComponentLink1URL=https://cdn.amphenol-icc.com/media/wysiwyg/files/drawing/20021121.pdf, Connector Type=Header, Contact Finish - Mating=Gold, Contact Finish - Post=Tin, Contact Finish Thickness - Mating="10µin (0.25µm)", Contact Finish Thickness - Post="50µin (1.27µm)", Contact Length - Mating="0.120\" (3.05mm)", Contact Length - Post=-, Contact Material="Copper Alloy", Contact Shape=Square, Contact Type="Male Pin", Fastening Type=Push-Pull, Features="Pick and Place", Ingress Protection=-, Insulation Height=-, Insulation Material=Thermoplastic, Manufacturer Part Number=20021121-00006C4LF, Mated Stacking Heights=-, Mounting Type="Surface Mount", Number of Positions=6, Number of Positions Loaded=All, Number of Rows=2, Operating Temperature=-, Overall Contact Length=-, Packaging="Cut Tape (CT)", Part Status=Active, Pitch - Mating="0.050\" (1.27mm)", Pricing 1="1=0.73, 10=0.683, 100=0.523 (CAD)", RoHS="RoHS Compliant", Row Spacing - Mating="0.050\" (1.27mm)", Shrouding=Unshrouded, Stock 1=40686, Style="Board to Board", Supplier 1=Digi-Key, Termination=Solder, Voltage Rating=-
J3: "CONN RCPT USB TYPE A R/A GOLD", Current Rating="1A per Contact", Insulation Color=Black, Manufacturer="Amphenol Commercial Products", Material Flammability Rating="UL94 V-0", Operating Temperature="-40°C ~ 85°C", Supplier Part Number 1=UE27AC54100-ND, Voltage - Rated=30VAC, Category="Connectors, Interconnects", ComponentLink1Description=https://www.amphenolcanada.com/ProductSearch/drawings/AC/UE27ACX4X0X.pdf, ComponentLink1URL=https://www.amphenolcanada.com/ProductSearch/drawings/AC/UE27ACX4X0X.pdf, Connector Type="USB - A", Contact Finish=Gold, Features="Board Lock", Gender=Receptacle, Ingress Protection=-, Manufacturer Part Number=UE27AC54100, Mating Cycles=1500, Mounting Feature=Horizontal, Mounting Type="Through Hole, Right Angle", Number of Contacts=4, Packaging=Tray, Part Status=Active, Pricing 1="1=0.55, 10=0.519, 25=0.4676, 50=0.4154, 100=0.398, 250=0.3634, 500=0.34608, 1000=0.28552, 2500=0.25956 (CAD)", RoHS="RoHS Compliant", Shell/Shielding Material="Copper Alloy", Shielding=Shielded, Specifications="USB 2.0", Stock 1=45705, Supplier 1=Digi-Key, Termination=Solder
J4: "CONN TERM BLOCK T/H 4POS 3.5MM", Color=Green, Manufacturer="Phoenix Contact", Operating Temperature=-, Supplier Part Number 1=277-1860-ND, Category="Connectors, Interconnects", Clamp Material - Plating=-, ComponentLink1Description=https://media.digikey.com/pdf/Data%20Sheets/Phoenix%20Contact%20PDFs/Combicon%20Compact%20Series.pdf, ComponentLink1URL=https://media.digikey.com/pdf/Data%20Sheets/Phoenix%20Contact%20PDFs/Combicon%20Compact%20Series.pdf, Contact Material - Plating=-, Features="Interlocking (Side)", Housing Material="Polyamide (PA), Nylon", Manufacturer Part Number=1984633, Mating Orientation="Horizontal with Board", Mounting Type="Through Hole", Packaging=Bulk, Part Status=Active, Pitch="0.138\" (3.50mm)", Positions Per Level=4, Pricing 1="1=1.24, 10=1.185, 50=1.133, 100=1.1021, 250=1.03, 500=0.94762, 1000=0.87551 (CAD)", RoHS="RoHS Compliant", Screw Material - Plating=-, Screw Thread=M2, Stock 1=4509, Supplier 1=Digi-Key, Torque - Screw="0.22-0.25 Nm (1.9-2.2 Lb-In)", Wire Gauge="16-26 AWG", Wire Termination=Screw
L1: "FIXED IND 4.7UH 3A 40.3 MOHM SMD", DC Resistance (DCR)="35 mOhm Max", Manufacturer="Bourns Inc.", Manufacturer Part Number=SRN5040-4R7M, Operating Temperature="-40°C ~ 125°C", Package / Case=Nonstandard, Q @ Freq="15 @ 7.96MHz", Ratings=-, Supplier Part Number 1=SRN5040-4R7MCT-ND, Tolerance=±20%, Category="Inductors, Coils, Chokes", ComponentLink1Description=http://www.bourns.com/docs/Product-Datasheets/SRN5040.pdf, ComponentLink1URL=http://www.bourns.com/docs/Product-Datasheets/SRN5040.pdf, Height - Seated (Max)="0.157\" (4.00mm)", Material - Core=Ferrite, Mounting Type="Surface Mount", Packaging="Cut Tape (CT)", Part Status=Active, Pricing 1="1=0.6, 10=0.529, 100=0.3785, 500=0.31788 (CAD)", RoHS="RoHS Compliant", Shielding=Semi-Shielded, Size / Dimension="0.197\" L x 0.197\" W (5.00mm x 5.00mm)", Stock 1=798, Supplier 1=Digi-Key, Supplier Device Package=-, Type=Wirewound
L2: "FIXED IND 100UH 1A 120 MOHM TH", DC Resistance (DCR)="100 mOhm Max", Manufacturer="Murata Power Solutions Inc.", Manufacturer Part Number=18R104C, Operating Temperature="0°C ~ 70°C", Package / Case="Radial, Vertical Cylinder", Q @ Freq="40 @ 100kHz", Ratings=-, Supplier Part Number 1=811-1320-ND, Tolerance=±10%, Category="Inductors, Coils, Chokes", ComponentLink1Description=https://www.murata-ps.com/data/magnetics/kmp_1800r.pdf, ComponentLink1URL=https://www.murata-ps.com/data/magnetics/kmp_1800r.pdf, Height - Seated (Max)="0.626\" (15.90mm)", Material - Core=-, Mounting Type="Through Hole", Packaging=Bulk, Part Status=Active, Pricing 1="1=1.95, 10=1.923, 25=1.9088, 50=1.854, 100=1.7716, 250=1.64804, 500=1.53816, 1000=1.53431 (CAD)", RoHS="RoHS Compliant", Shielding=Unshielded, Size / Dimension="0.539\" Dia (13.70mm)", Stock 1=100, Supplier 1=Digi-Key, Supplier Device Package=-, Type=Wirewound
Q1 Q2: "MOSFET N-CH 60V 17A LFPAK", Current - Continuous Drain (Id) @ 25°C="17A (Tc)", Drive Voltage (Max Rds On,  Min Rds On)=5V, Manufacturer="Nexperia USA Inc.", Operating Temperature="-55°C ~ 175°C (TJ)", Package / Case="SOT-1210, 8-LFPAK33 (5-Lead)", Power Dissipation (Max)="36W (Tc)", Supplier Device Package=LFPAK33, Supplier Part Number 1=1727-2583-1-ND, Category="Discrete Semiconductor Products", ComponentLink1Description=https://assets.nexperia.com/documents/data-sheet/BUK9M53-60E.pdf, ComponentLink1URL=https://assets.nexperia.com/documents/data-sheet/BUK9M53-60E.pdf, FET Feature=-, FET Type=N-Channel, Manufacturer Part Number=BUK9M53-60EX, Mounting Type="Surface Mount", Packaging="Cut Tape (CT)", Part Status=Active, Pricing 1="1=0.73, 10=0.61, 100=0.4575, 500=0.33548 (CAD)", Rds On (Max) @ Id, Vgs="46 mOhm @ 5A, 10V", RoHS="RoHS Compliant", Stock 1=481, Supplier 1=Digi-Key, Technology="MOSFET (Metal Oxide)", Vgs (Max)=±10V, Vgs(th) (Max) @ Id="2.1V @ 1mA"
R1 R2 R3 R4 R5 R6 R7 R8 R9 R10 R11 R12 R13 R14 R15 R16 R17 R18 R19 R20 R21 R22 R23 R24 R25 R26 R27 R29: "Resistor", LatestRevisionDate=17-Jul-2002, LatestRevisionNote="Re-released for DXP Platform.", PackageDescription="Axial Device, Thru-Hole; 2 Leads; 0.3 in Pin Spacing", PackageReference=AXIAL-0.3, Published=8-Jun-2000, Publisher="Altium Limited"
  R27: Size="0805 (2012 Metric)"
R28: "Resistor", Power Rating=1/4W, LatestRevisionDate=17-Jul-2002, LatestRevisionNote="Re-released for DXP Platform.", PackageDescription="Axial Device, Thru-Hole; 2 Leads; 0.3 in Pin Spacing", PackageReference=AXIAL-0.3, Published=8-Jun-2000, Publisher="Altium Limited", Size="1206 (3216 Metric)"
S1 S2: "SWITCH TACTILE SPST-NO 0.05A 12V", Contact Rating @ Voltage="0.05A @ 12VDC", Illumination Type, Color=-, Manufacturer=C&K, Operating Force=160gf, Operating Temperature="-20°C ~ 60°C", Supplier Part Number 1=CKN10822CT-ND, Actuator Height off PCB, Vertical=9.50mm, Actuator Length, Right Angle=-, Actuator Material="Polyamide (PA66), Nylon 6/6", Actuator Orientation="Top Actuated", Actuator Type=Standard, Category=Switches, Circuit=SPST-NO, ComponentLink1Description=http://www.ckswitches.com/media/1471/pts645.pdf, ComponentLink1URL=http://www.ckswitches.com/media/1471/pts645.pdf, Features="Blue Actuator", Illumination=Non-Illuminated, Illumination Voltage (Nominal)=-, Ingress Protection=-, Manufacturer Part Number=PTS645SM95SMTR92LFS, Mechanical Life="100,000 Cycles", Mounting Type="Surface Mount", Outline="6.00mm x 6.00mm", Packaging="Cut Tape (CT)", Part Status=Active, Pricing 1="1=0.41, 10=0.404, 25=0.3896, 50=0.3752, 100=0.3545, 250=0.3336 (CAD)", RoHS="RoHS Compliant", Stock 1=8178, Supplier 1=Digi-Key, Switch Function=Off-Mom, Switch Travel=-, Termination Style="Gull Wing"
U1: "8-bit AVR Microcontroller, 16KB Flash, 512 Bytes EEPROM, 1KB SRAM, 44-pin TQFP, Industrial Grade (-40°C to 85°C)", Supplier Part Number 1=ATMEGA164A-AU-ND, ComponentLink1Description="Manufacturer Link", ComponentLink1URL=http://www.atmel.com/products/avr/default.asp?, ComponentLink2Description="ATmega164A/164PA/324A/324PA/644A/644PA/1284/1284P Datasheet", ComponentLink2URL=http://www.atmel.com/dyn/resources/prod_documents/doc8272.pdf, ComponentLink3Description="ATmega164A/164PA/324A/324PA/644A/644PA/1284/1284P Summary", ComponentLink3URL=http://www.atmel.com/dyn/resources/prod_documents/8272S.pdf, ComponentLink4Description="Atmel.com Home", ComponentLink4URL=http://www.atmel.com, DatasheetVersion="revA, Jan-2010", PackageDescription="44-Pin Plastic Thin Profile Quad Flat Pack, 10 x 10 x 1.0 mm Body, 0.8 mm Pitch (TQFP)", PackageReference=44A, PackageVersion="rev.B, Oct-2001", Published=1-Apr-2010, Publisher="Altium Limited", Supplier 1=Digi-Key, Supplier 2=Mouser, Supplier Part Number 2=556-ATMEGA164A-AU
U2: "IC OPAMP GP 1.3MHZ RRO 14SO", Base Part Number=LMV324, Current - Supply=162µA, Manufacturer=STMicroelectronics, Operating Temperature="-40°C ~ 125°C", Package / Case="14-SOIC (0.154\", 3.90mm Width)", Supplier Device Package=14-SO, Supplier Part Number 1=497-10222-1-ND, Voltage - Supply, Single/Dual (±)="2.7 V ~ 6 V", Amplifier Type="General Purpose", Category="Integrated Circuits (ICs)", ComponentLink1Description=http://www.st.com/content/ccc/resource/technical/document/datasheet/b9/d8/3b/8f/a1/8f/46/01/CD00079372.pdf/files/CD00079372.pdf/jcr:content/translations/en.CD00079372.pdf, ComponentLink1URL=http://www.st.com/content/ccc/resource/technical/document/datasheet/b9/d8/3b/8f/a1/8f/46/01/CD00079372.pdf/files/CD00079372.pdf/jcr:content/translations/en.CD00079372.pdf, Manufacturer Part Number=LMV324IYDT, Mounting Type="Surface Mount", Output Type=Rail-to-Rail, Packaging="Cut Tape (CT)", Part Status=Active, Pricing 1="1=0.91, 10=0.779, 100=0.5821, 500=0.4573, 1000=0.35339 (CAD)", RoHS="RoHS Compliant", Slew Rate="0.45 V/µs", Stock 1=4245, Supplier 1=Digi-Key
U3: "IC REG BUCK ADJ 3A SYNC 8SOIC", Current - Output=3A, Frequency - Switching=500kHz, Manufacturer="Diodes Incorporated", Operating Temperature="-40°C ~ 85°C (TA)", Package / Case="8-SOIC (0.154\", 3.90mm Width) Exposed Pad", Supplier Device Package=8-PSOP, Supplier Part Number 1=AP3513EMPTR-G1DICT-ND, Voltage - Input (Max)=18V, Voltage - Input (Min)=4.5V, Voltage - Output (Max)=16.2V, Voltage - Output (Min/Fixed)=0.925V, Category="Integrated Circuits (ICs)", ComponentLink1Description=https://www.diodes.com/assets/Datasheets/AP3513E.pdf, ComponentLink1URL=https://www.diodes.com/assets/Datasheets/AP3513E.pdf, Function=Step-Down, Manufacturer Part Number=AP3513EMPTR-G1, Mounting Type="Surface Mount", Number of Outputs=1, Output Configuration=Positive, Output Type=Adjustable, Packaging="Cut Tape (CT)", Part Status=Active, Pricing 1="1=0.92, 10=0.791, 100=0.5905, 500=0.46394, 1000=0.3585 (CAD)", RoHS="RoHS Compliant", Stock 1=23505, Supplier 1=Digi-Key, Synchronous Rectifier=Yes, Topology=Buck
U4: "IC MOSFET DRVR SYNC BUCK 8-SOIC", Base Part Number=ISL6208, Current - Peak Output (Source, Sink)="2A, 2A", Logic Voltage - VIL, VIH="0.5V, 2V", Manufacturer=Intersil, Operating Temperature="-10°C ~ 125°C (TJ)", Package / Case="8-SOIC (0.154\", 3.90mm Width)", Supplier Device Package=8-SOIC, Supplier Part Number 1=ISL6208CBZ-TCT-ND, Voltage - Supply="4.5 V ~ 5.5 V", Category="Integrated Circuits (ICs)", Channel Type=Synchronous, ComponentLink1Description=http://www.intersil.com/content/dam/intersil/documents/isl6/isl6208-b.pdf, ComponentLink1URL=http://www.intersil.com/content/dam/intersil/documents/isl6/isl6208-b.pdf, Driven Configuration=Half-Bridge, Gate Type="N-Channel MOSFET", Input Type=Non-Inverting, Manufacturer Part Number=ISL6208CBZ-T, Mounting Type="Surface Mount", Packaging="Cut Tape (CT)", Part Status=Active, Pricing 1="1=2.62, 10=2.355, 100=1.893, 500=1.55528, 1000=1.28866 (CAD)", Rise / Fall Time (Typ)="8ns, 8ns", RoHS="RoHS Compliant", Stock 1=1957, Supplier 1=Digi-Key
VR1: "TRIMMER 10K OHM 0.1W SMD", Manufacturer="Bourns Inc.", Power (Watts)="0.1W, 1/10W", Resistive Material=Cermet, Supplier Part Number 1=TC33X-103ECT-ND, Temperature Coefficient=±250ppm/°C, Tolerance=±25%, Adjustment Type="Top Adjustment", Category="Potentiometers, Variable Resistors", ComponentLink1Description=http://www.bourns.com/docs/Product-Datasheets/TC33.pdf, ComponentLink1URL=http://www.bourns.com/docs/Product-Datasheets/TC33.pdf, Manufacturer Part Number=TC33X-2-103E, Mounting Type="Surface Mount", Packaging="Cut Tape (CT)", Part Status=Active, Pricing 1="1=0.41, 10=0.405, 25=0.366, 50=0.3492, 100=0.3378, 250=0.31532, 500=0.28716, 1000=0.259 (CAD)", RoHS="RoHS Compliant", Size / Dimension="Rectangular - 0.150\" x 0.142\" Face x 0.047\" H (3.80mm x 3.60mm x 1.20mm)", Stock 1=75902, Supplier 1=Digi-Key, Termination Style="J Lead"
XTAL1: "CRYSTAL 20.0000MHZ 9PF SMD", Frequency Stability=±20ppm, Frequency Tolerance=±10ppm, Load Capacitance=9pF, Manufacturer=EPSON, Operating Mode=Fundamental, Operating Temperature="-40°C ~ 105°C", Package / Case="4-SMD, No Lead", Ratings=-, Supplier Part Number 1=SER3629CT-ND, Category="Crystals, Oscillators, Resonators", ComponentLink1Description=https://support.epson.biz/td/api/doc_check.php?dl=brief_FA-238V_en.pdf, ComponentLink1URL=https://support.epson.biz/td/api/doc_check.php?dl=brief_FA-238V_en.pdf, Height - Seated (Max)="0.024\" (0.60mm)", Manufacturer Part Number="TSX-3225 20.0000MF20G-AC3", Mounting Type="Surface Mount", Packaging="Cut Tape (CT)", Part Status=Active, Pricing 1="1=0.77, 10=0.643, 50=0.578, 100=0.5136 (CAD)", RoHS="RoHS Compliant", Size / Dimension="0.126\" L x 0.098\" W (3.20mm x 2.50mm)", Stock 1=5308, Supplier 1=Digi-Key, Type="MHz Crystal"
Z1: "IC VREF SHUNT 4.096V SOT23", Base Part Number=LM4040, Current - Supply=-, Manufacturer="Microchip Technology", Operating Temperature="-40°C ~ 85°C (TA)", Package / Case="TO-236-3, SC-59, SOT-23-3", Supplier Device Package=SOT-23-3, Supplier Part Number 1=576-2568-1-ND, Temperature Coefficient=100ppm/°C, Tolerance=±0.5%, Voltage - Output (Min/Fixed)=4.096V, Category="Integrated Circuits (ICs)", ComponentLink1Description=http://www.microchip.com/mymicrochip/filehandler.aspx?ddocname=en579040, ComponentLink1URL=http://www.microchip.com/mymicrochip/filehandler.aspx?ddocname=en579040, Manufacturer Part Number=LM4040CYM3-4.1-TR, Mounting Type="Surface Mount", Noise - 0.1Hz to 10Hz=-, Noise - 10Hz to 10kHz=80µVrms, Output Type=Fixed, Packaging="Cut Tape (CT)", Part Status=Active, Pricing 1="1=0.5, 25=0.4032, 100=0.372 (CAD)", Reference Type=Shunt, RoHS="RoHS Compliant", Stock 1=1871, Supplier 1=Digi-Key, Voltage - Input=-
Z2: "TVS DIODE 26VWM 42.1VC SMC", Base Part Number=SMCJ26, Capacitance @ Frequency=-, Current - Peak Pulse (10/1000µs)=35.6A, Manufacturer="Diodes Incorporated", Operating Temperature="-55°C ~ 150°C (TJ)", Package / Case="DO-214AB, SMC", Power - Peak Pulse="1500W (1.5kW)", Power Line Protection=No, Supplier Device Package=SMC, Supplier Part Number 1=SMCJ26A-FDICT-ND, Voltage - Breakdown (Min)=28.9V, Voltage - Clamping (Max) @ Ipp=42.1V, Voltage - Reverse Standoff (Typ)=26V, Applications="General Purpose", Category="Circuit Protection", ComponentLink1Description=https://www.diodes.com/assets/Datasheets/ds19003.pdf, ComponentLink1URL=https://www.diodes.com/assets/Datasheets/ds19003.pdf, Manufacturer Part Number=SMCJ26A-13-F, Mounting Type="Surface Mount", Packaging="Cut Tape (CT)", Part Status=Active, Pricing 1="1=0.88, 10=0.77, 100=0.5905, 500=0.4668, 1000=0.37344 (CAD)", RoHS="RoHS Compliant", Stock 1=3205, Supplier 1=Digi-Key, Type=Zener
Z3: "TVS DIODE 160VWM 259VC SMC", Base Part Number=SMCJ160, Capacitance @ Frequency=-, Current - Peak Pulse (10/1000µs)=5.8A, Manufacturer="ON Semiconductor", Package / Case="DO-214AB, SMC", Power - Peak Pulse="1500W (1.5kW)", Power Line Protection=No, Supplier Device Package="SMC (DO-214AB)", Supplier Part Number 1=SMCJ160AFSCT-ND, Voltage - Breakdown (Min)=178V, Voltage - Clamping (Max) @ Ipp=259V, Voltage - Reverse Standoff (Typ)=160V, Applications="General Purpose", Category="Circuit Protection", ComponentLink1Description=https://www.fairchildsemi.com/datasheets/SM/SMCJ100A.pdf, ComponentLink1URL=https://www.fairchildsemi.com/datasheets/SM/SMCJ100A.pdf, Manufacturer Part Number=SMCJ160A, Mounting Type="Surface Mount", Operating Temperature=-, Packaging="Cut Tape (CT)", Part Status=Active, Pricing 1="1=0.84, 10=0.732, 100=0.561, 500=0.44352, 1000=0.35481 (CAD)", RoHS="RoHS Compliant", Stock 1=16752, Supplier 1=Digi-Key, Type=Zener

## Free pads (board coordinates)
  round 1.5 hole 0.9: 0(40.75,35.75)

## Via types
v1: diameter 1, hole 0.5, Top Layer to Bottom Layer, tented both sides, 127 vias

## Nets (pads, with @x,y where several pads share a name; then routed paths per layer and width w, separated by ;. In a path a pad name is that pad's centre, name@x,y a point inside that pad or via, vN(x,y) a via of type N, cw(c..) or ccw(c..) an arc to the next point about the centre after c; other vN are vias at no path point)
4.096V: C6.2 C9.2 C10.2 R6.1 R11.2 U1.29 U2.4 Z1.1 | length 78.7
  Top Layer w0.25: v1(18.225,54.85) 18.575,55.2 C10.2
  Top Layer w0.5: C10.2@20.7,55.2 21.2,55.7 U1.29 ; v1(55.575,47.075) Z1.1
  Top Layer w0.6: v1(52.8,64.2) C9.2 59.55,64.2 60,63.75 U2.4 ; R6.1 56,45.25 56.25,45.5 C6.2 57.7,46.05 57.55,46.2 Z1.1 ; v1(61,51.25) R11.2
  Bottom Layer w0.25: v1(18.225,54.85) 21.5,58.125 21.5,78.3 22.725,79.525 v1@53,79.525
  other v1: 53,79.5
5V: C19.2 C20.2 C22.2 C23.2 C24.2 C25.2 C26.2 C27.2 C28.2 DS1.2 DS1.21 DS1.23 J1.2 J2.1 J2.2 J3.1 L1.1 R6.2 R17.2 R18.2 R20.2 R24.2 U1.5 U1.17 U1.27 U1.38 U4.6 | length 65.3
  Top Layer w0.5: v1@17.3,58.05 C24.2 20.7,58.05 21.45,57.3 U1.27 ; C25.2 27.55,48.625 27.95,49.025 U1.38 ; U1.17 28.75,64.325 29.15,64.725 C23.2 ; U1.5 36.3,55.7 36.8,55.2 C26.2 ; v1(40.52,45.27) J1.2 ; J2.2 J2.1
  Top Layer w0.6: R24.2 v1(14.4,34.2)
  Top Layer w0.65: v1(50.75,45.25) R6.2 ; v1(66.25,18.25) R20.2
  Top Layer w1: v1(5.3,30.9) C28.2 6.8,30 7.4,29.4 10.5,29.4 11.165,28.735 U4.6 ; DS1.2@12.4,61.235 C27.2 ; v1(27.55,46.575) C25.2 ; C23.2 v1(29.15,66.8) ; C26.2 v1(38.95,55.2) ; 52.9,17.1 C20.2 ; C20.2@52.95,18.3 L1.1@52.95,22.695 ; J3.1 55.5,14.5 55.5,16.5 56.75,17.75 C22.2
  PWR Plane w1: 81.112,43.616 81.112,53.793 81.449,54.13 DS1.21
  other v1: 53,12.75 53,14.25 53,15.5 17.5,58 43,66.5
Analog_Signal_Batt_I: C12.1 R15.1 U1.30 U2.7 | length 95.2
  Top Layer w0.25: v1(19.4,54) 19.675,54 19.9,54.225 20.975,54.225 21.65,54.9 U1.30 ; C12.1 64.3,60.7 63.81,61.19 U2.7 64.725,62.275 v1(65,62)
  Bottom Layer w0.25: v1(19.4,54) 22,56.6 22,77.9 22.925,78.825 52.175,78.825 56.5,74.5 66.5,74.5 67.75,73.25 67.75,64.75 v1(65,62)
Analog_Signal_Batt_V: U1.31 U2.1 U2.2 | length 97.9
  Top Layer w0.25: v1(20.6,53.225) 21,53.25 21.85,54.1 U1.31 ; v1(56.25,60.5) 56.25,62.215 U2.1 U2.2
  Bottom Layer w0.25: v1(20.6,53.225) 22.5,55.125 22.5,77.6 23.125,78.225 51.525,78.225 56.5,73.25 65.75,73.25 66.5,72.5 66.5,71 65.75,70.25 59,70.25 56.25,67.5 v1(56.25,60.5)
Analog_Signal_PV_I: C13.1 R16.1 U1.32 U2.8 | length 78.2
  Top Layer w0.25: v1@21.25,52.5 22.05,53.3 U1.32 ; U2.8 64.05,67.965 C13.1 v1(65.25,72)
  Bottom Layer w0.25: v1(21.25,52.25) 23,54 23,77.2 23.4,77.6 50.9,77.6 56.5,72 v1(65.25,72)
Analog_Signal_PV_V: U1.33 U2.13 U2.14 | length 66.9
  Top Layer w0.25: v1(22.05,51.45) U1.33 ; v1(56.5,69.75) 56.19,69.44 U2.14 U2.13
  Bottom Layer w0.25: v1(22.05,51.45) 23.5,52.9 23.5,76.7 23.8,77 49.25,77 v1(56.5,69.75)
Batt_Shunt: J4.4 R12.1 R28.2 | length 156.9
  Top Layer w0.25: v1(44.25,40.25) 44.25,41.75 45,42.5 46.75,42.5 47.25,42 60.5,42 62.75,44.25 R12.1
  Bottom Layer w0.25: J4.4 31.25,3.75 33.25,1.75 69,1.75 70.5,3.25 70.5,8.25 73.75,11.5 79,11.5 80.5,13 80.5,34.75 79.5,35.75 67.25,35.75 62.75,31.25 50.5,31.25 44.5,37.25 44.5,40 v1(44.25,40.25)
Charger_FCCM: R26.2 U1.43 U4.7 | length 58.1
  Top Layer w0.35: U4.7 12.435,25.965 12.9,25.5 14.6,25.5 16.5,27.4 16.5,29 17.25,29.75 29.85,29.75 37.5,37.4 37.5,42.25 34.5,45.25 34.5,49.1 33.597,50.003 33.597,51.665 33.089,52.172 32.298,52.172 31.95,51.824 U1.43
  Top Layer w0.6: R26.2 10.95,30.85 12.435,29.365 U4.7
Charger_PWM: R24.1 R25.2 U1.44 U4.3 | length 50.9
  Top Layer w0.35: R24.1 11.3,35 11.6,35.3 14.7,35.3 16.25,33.75 16.25,31.35 17.1,30.5 29.6,30.5 36.75,37.65 36.75,41.75 33.5,45 33.5,48.686 32.75,49.436 U1.44
  Top Layer w0.6: R25.2 11.03,34.2 11.165,34.065 U4.3
GND: C1.1 C2.1 C3.1 C4.2 C5.2 C6.1 C7.1 C8.1 C9.1 C10.1 C11.1 C14.2 C17.1 C18.1 C19.1 C20.1 C21.2 C22.1 C23.1 C24.1 C25.1 C26.1 C27.1 C28.1 C29.2 C30.2 C31.1 C33.1 C34.1 D1.1 D2.1 DS1.1 J1.6 J2.5 J2.6 J3.4 J3.5 pad.0 Q2.1 Q2.2 Q2.3 R9.1 R10.1 R14.1 R19.2 R21.1 R22.1 R23.1 R25.1 R26.1 R27.2 R28.1 S1.1 S1.3 S2.1 S2.3 U1.6 U1.18 U1.28 U1.39 U2.10 U2.11 U3.4 U3.9 U4.4 VR1.1 VR1.2 XTAL1.2 XTAL1.4 Z1.2 Z2.2 Z3.2 | length 79
  Top Layer w0.25: C8.1@59.85,70.25 59.85,68.9 60,68.75 U2.11 U2.10
  Top Layer w0.5: VR1.1 5.4,60.95 VR1.2 8.55,61.95 C3.1 9.395,61.105 DS1.1 ; C24.1 19.45,56.45 19.8,56.8 C10.1 20.7,56.8 21,56.5 U1.28 ; v1(23.25,45.75) 23.25,46.95 C4.2 23.2,47.45 23.8,48.05 C5.2 ; C23.1 27.55,64.85 27.95,64.45 U1.18 ; U1.39 28.75,49.075 29.15,48.675 C25.1 ; U1.6 36.5,56.5 ; D1.1 34.5,72.5 35.5,73.5 v1(36,73.5) 36.5,73.5 37.25,72.75 D2.1 ; v1(37.98,45.27) J1.6 ; J2.6 v1(40.48,66.5) J2.5
  Top Layer w0.6: v1(52.8,65.8) C9.1 59.55,65.8 60,66.25 U2.11 ; v1(59.35,54.85) v1(59.35,60.5) ; Z1.2 59.45,46.45 59.3,46.3 C6.1 v1(60.75,45.5)
  Top Layer w1: v1(5.3,32.5) C28.1 U4.4@9.82,32.5 ; R25.1 7.8,33.05 R26.1 ; DS1.1@10.8,61.305 C27.1 ; v1(17.5,56.25) 18.55,56.25 C24.1 ; C23.1 v1(27.55,66.8) ; v1(29.15,46.575) C25.1
  Bottom Layer w0.5: S2.3 v1(28.975,37) S2.1 ; S1.3 v1(60.975,37) S1.1
  other v1: 50,5 55.25,5.25 62,5.25 45.75,6.25 58.75,8 48.75,10.5 37.906,12.35 37.25,14.5 27,15 29,15 30.75,15 32.75,15 34.75,15 47.75,15.25 71.25,15.25 5.25,15.75 61.75,17.75 64,17.75 15.75,18.25 17.75,18.25 76.5,19.25 62.5,19.5 56.75,19.75 58.5,19.75 60.25,19.75 64.5,19.75 3.75,21.75 65.95,22.4 67.05,22.4 65.95,23.5 67.05,23.5 65.95,24.6 67.05,24.6 7.75,24.75 43.5,24.75 76.5,25.25 38.75,25.75 2.5,27.75 7,27.75 28.75,27.75 25,28 52.25,28.5 41.75,28.75 47.5,28.75 57.75,29.25 34.75,29.75 54.75,30 72.5,30.75 75.75,31 67.75,31.25 38.25,31.5 28.75,31.75 44.25,32 6.25,34.25 45.25,55 39,56.5 38,58.75 45,60.75
Keepout_2.2: 
LCD_/CS1: DS1.5 U1.14 | length 48.9
  Top Layer w0.25: DS1.5 9.665,58.565 8.7,57.6 4.5,57.6 4.1,58 4.1,62.4 5.7,64 12,64 16.1,68.1 24.5,68.1 25.9,69.5 30.1,69.5 31.5,68.1 31.5,63.7 31.15,63.35 U1.14
LCD_/CS2: DS1.6 U1.15 | length 31.9
  Top Layer w0.25: DS1.6 12.865,58.565 13.3,59 13.3,63.8 17,67.5 25,67.5 26.3,68.8 29.8,68.8 30.9,67.7 30.9,64.1 30.35,63.55 U1.15
LCD_A0: DS1.4 U1.42 | length 43.5
  Top Layer w0.25: v1@19.4,50.15 19.4,45.85 22,43.25 30.375,43.25 31.65,44.525 31.65,49.35 31.15,49.85 U1.42
  Bottom Layer w0.25: DS1.4@12.535,59.835 14.7,62 16.6,62 17.4,61.2 17.4,59.4 16.4,58.4 16.4,55.2 19.4,52.2 v1(19.4,50.1)
LCD_Backlight: R1.1 R2.1 U1.16 | length 138.3
  Top Layer w0.5: R2.1 v1(5.15,54) ; v1(17.338,66.238) 17.675,66.575 25.5,66.575 26.8,67.875 29.45,67.875 30.175,67.15 30.175,64.7 29.55,64.075 U1.16 ; R1.1 78.75,56.85 v1(78.75,58.25)
  Bottom Layer w0.5: v1@4.975,54 4.975,64.775 6.425,66.225 17.35,66.225 17.35,78.875 19.625,81.15 68.85,81.15 71,79 71,74.36 78.75,66.61 v1(78.75,58.25)
LCD_CL: DS1.7 U1.13 | length 52.5
  Top Layer w0.25: DS1.7 9.795,57.295 9.4,56.9 4.1,56.9 3.2,57.8 3.2,62.7 5.3,64.8 11.5,64.8 15.4,68.7 24.1,68.7 25.7,70.3 30.3,70.3 32.2,68.4 32.2,63.4 31.95,63.15 U1.13
LCD_D0: DS1.10 U1.19 | length 23.9
  Top Layer w0.25: DS1.10 13.225,56.025 13.8,56.6 13.8,61.4 17.975,65.575 25.125,65.575 27.15,63.55 U1.19
LCD_D1: DS1.11 U1.20 | length 30.8
  Top Layer w0.25: v1(18.7,64.6) 25,64.6 26.35,63.25 U1.20
  Bottom Layer w0.25: DS1.11 10.245,54.755 9.8,55.2 9.8,62.1 10.4,62.7 16.8,62.7 17.7,61.8 18.7,61.8 19.2,62.3 19.2,64.1 v1(18.7,64.6) v1@18.4,64.9
LCD_D2: DS1.12 U1.21 | length 21.1
  Top Layer w0.25: DS1.12 12.955,54.755 14.4,56.2 14.4,61.2 16.95,63.75 24.85,63.75 25.55,63.05 U1.21
LCD_D3: DS1.13 U1.22 | length 26.7
  Top Layer w0.25: v1(18.2,62.8) 22,62.8 22.2,63 23.05,62.15 U1.22
  Bottom Layer w0.25: DS1.13 10.115,53.485 9.2,54.4 9.2,62.2 10.4,63.4 17.6,63.4 v1(18.2,62.8)
LCD_D4: DS1.14 U1.23 | length 18.1
  Top Layer w0.25: DS1.14 13.285,53.485 15,55.2 15,61 15.7,61.7 21.9,61.7 U1.23
LCD_D5: DS1.15 U1.24 | length 28.9
  Top Layer w0.25: v1(15.9,60.5) 21.2,60.5 22,59.7 U1.24
  Bottom Layer w0.25: DS1.15 10.515,52.215 9.8,51.5 9.8,48.7 10.5,48 12.9,48 14.4,49.5 14.4,58.9 v1@15.75,60.25 ; v1@15.7,60.3 v1(15.9,60.5)
LCD_D6: DS1.16 U1.25 | length 16.6
  Top Layer w0.25: DS1.16 13.115,52.215 15.6,54.7 15.6,58.7 16.6,59.7 21.1,59.7 21.9,58.9 U1.25
LCD_D7: DS1.17 U1.26 | length 25.7
  Top Layer w0.25: DS1.17 10.545,50.945 9.8,50.2 9.8,48.7 10.5,48 12.9,48 16.4,51.5 16.4,58.4 17.1,59.1 20.8,59.1 21.8,58.1 U1.26
LCD_E: DS1.8 U1.40 | length 41.9
  Top Layer w0.25: v1(17.5,52.5) 19.25,52.5 20.75,51 20.75,46.5 23,44.25 28.525,44.25 30.2,45.925 30.2,48.825 29.55,49.475 U1.40
  Bottom Layer w0.25: DS1.8 13.295,57.295 13.8,57.8 13.8,59.8 15.4,61.4 16.3,61.4 16.8,60.9 16.8,59.9 15.6,58.7 15.6,54.9 17.5,53 v1(17.5,52.5)
LCD_R/W: DS1.9 U1.41 | length 45
  Top Layer w0.25: DS1.9 10.225,56.025 9.2,55 9.2,48.4 10.4,47.2 13.8,47.2 17.8,51.2 19.7,51.2 20.25,50.65 20.25,46 22.5,43.75 29.45,43.75 30.9,45.2 30.9,49.125 30.35,49.675 U1.41
LCD_RESET: DS1.18 U1.37 | length 24
  Top Layer w0.25: DS1.18 13.045,50.945 v1(15.45,53.35)
  Top Layer w0.5: v1(26.175,46.2) 26.175,48.375 27.15,49.35 U1.37
  Bottom Layer w0.25: v1(15.45,53.35) 15.45,52.45 18.8,49.1 24.2,49.1 26.175,47.125 v1(26.175,46.2)
NetC1_2: C1.2 U1.7 XTAL1.1 | length 10
  Top Layer w0.5: U1.7 36.3,57.3 36.75,57.75 39.75,57.75 40.5,57 42.25,57 42.8,57.55 XTAL1.1
NetC2_2: C2.2 U1.8 XTAL1.3 | length 7.8
  Top Layer w0.5: U1.8 35.85,58.1 38.35,60.6 XTAL1.3
NetC3_2: C3.2 DS1.3 VR1.3 | length 4.1
  Top Layer w0.5: VR1.3 8.4,58.7 C3.2 9.535,59.835 DS1.3
NetC7_2: C7.2 R7.1 R9.2 U2.3 | length 66.4
  Top Layer w0.25: v1(43.25,20.375) 45,18.625 45,13.882 45.35,13.532 R7.1@45.35,13 ; v1(43.25,39) 42.75,39.5 42.75,41.75 48.75,47.75 52.25,47.75 57.65,53.15 57.65,59.25 57.65,60.15 58.73,61.23 U2.3 ; R9.2@45.407,11.5 R7.1@45.407,12.85
  Bottom Layer w0.25: v1(43.25,39) 43.75,38.5 43.75,37.25 50.5,30.5 50.5,27.25 43.75,20.5 v1@43.375,20.5
NetC8_2: C8.2 R8.1 R10.2 U2.12 | length 226.5
  Top Layer w0.25: R10.2 6.665,13.053 R8.1 8.003,13.511 9.023,13.511 v1(10.47,14.958) ; v1(46.5,39.5) 60.75,39.5 67.25,46 67.25,73.25 65.25,75.25 59.75,75.25 58.15,73.65 58.15,69.35 58.73,68.77 U2.12
  Bottom Layer w0.25: v1(10.47,14.958) 10.542,14.958 14.5,11 14.5,4.75 18.5,0.75 69.65,0.75 71.5,2.6 71.5,7.6 74.4,10.5 79.9,10.5 81.486,12.086 81.486,35.264 80,36.75 66.75,36.75 62.25,32.25 51,32.25 45.75,37.5 45.75,38.75 v1(46.5,39.5)
NetC11_2: C11.2 R11.1 R14.2 U2.5 | length 7.8
  Top Layer w0.25: R11.1 61,57.65 R14.2 61.27,57.92 U2.5
NetC12_2: C12.2 R12.2 R15.2 U2.6 | length 5.5
  Top Layer w0.25: U2.6 62.54,61.21 62.75,61 R12.2
NetC13_2: C13.2 R13.1 R16.2 U2.9 | length 6.3
  Top Layer w0.25: R13.1 R16.2 62.4,68.85 62.54,68.71 U2.9
NetC14_1: C14.1 U3.8 | length 1.8
  Top Layer w0.65: U3.8@69.3,25.48 C14.1
NetC15_1: C15.1 L1.2 U3.3 | length 10.3
  Top Layer w0.65: L1.2@56.55,26.05 58,27.5 C15.1